# EAGLE board EEG_v3_11 (EAGLE 9.6.2), part 1 of 2
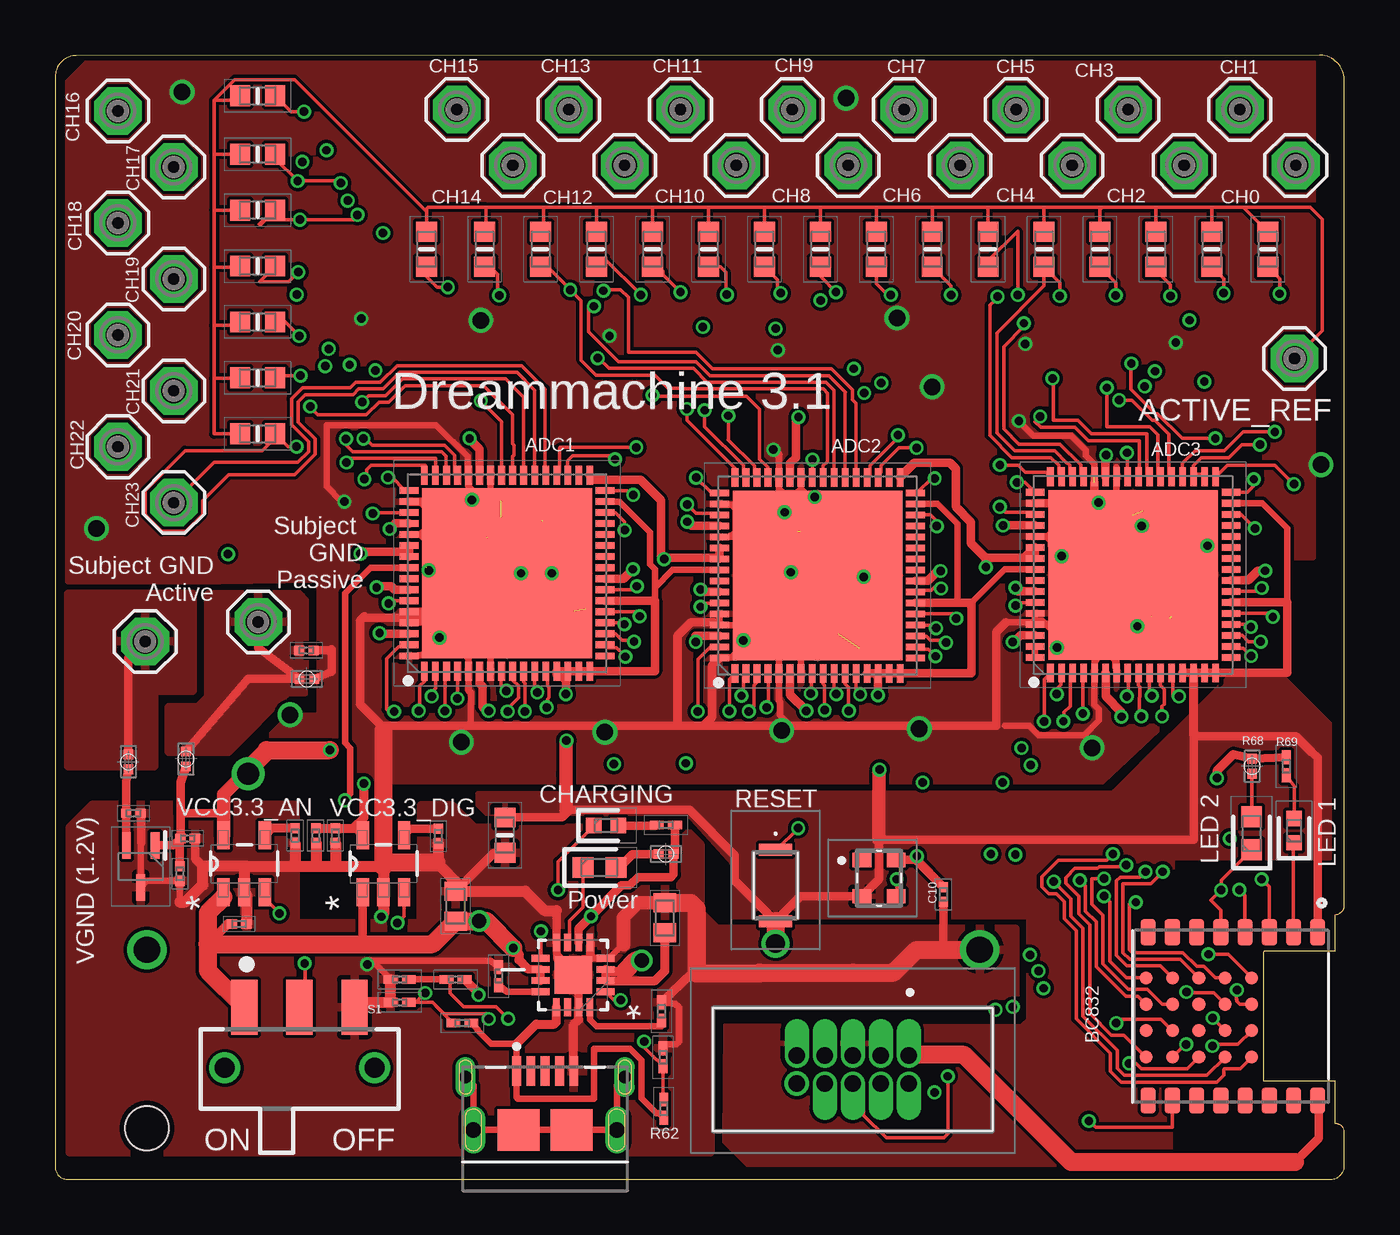
[diagram p0: board, top side]
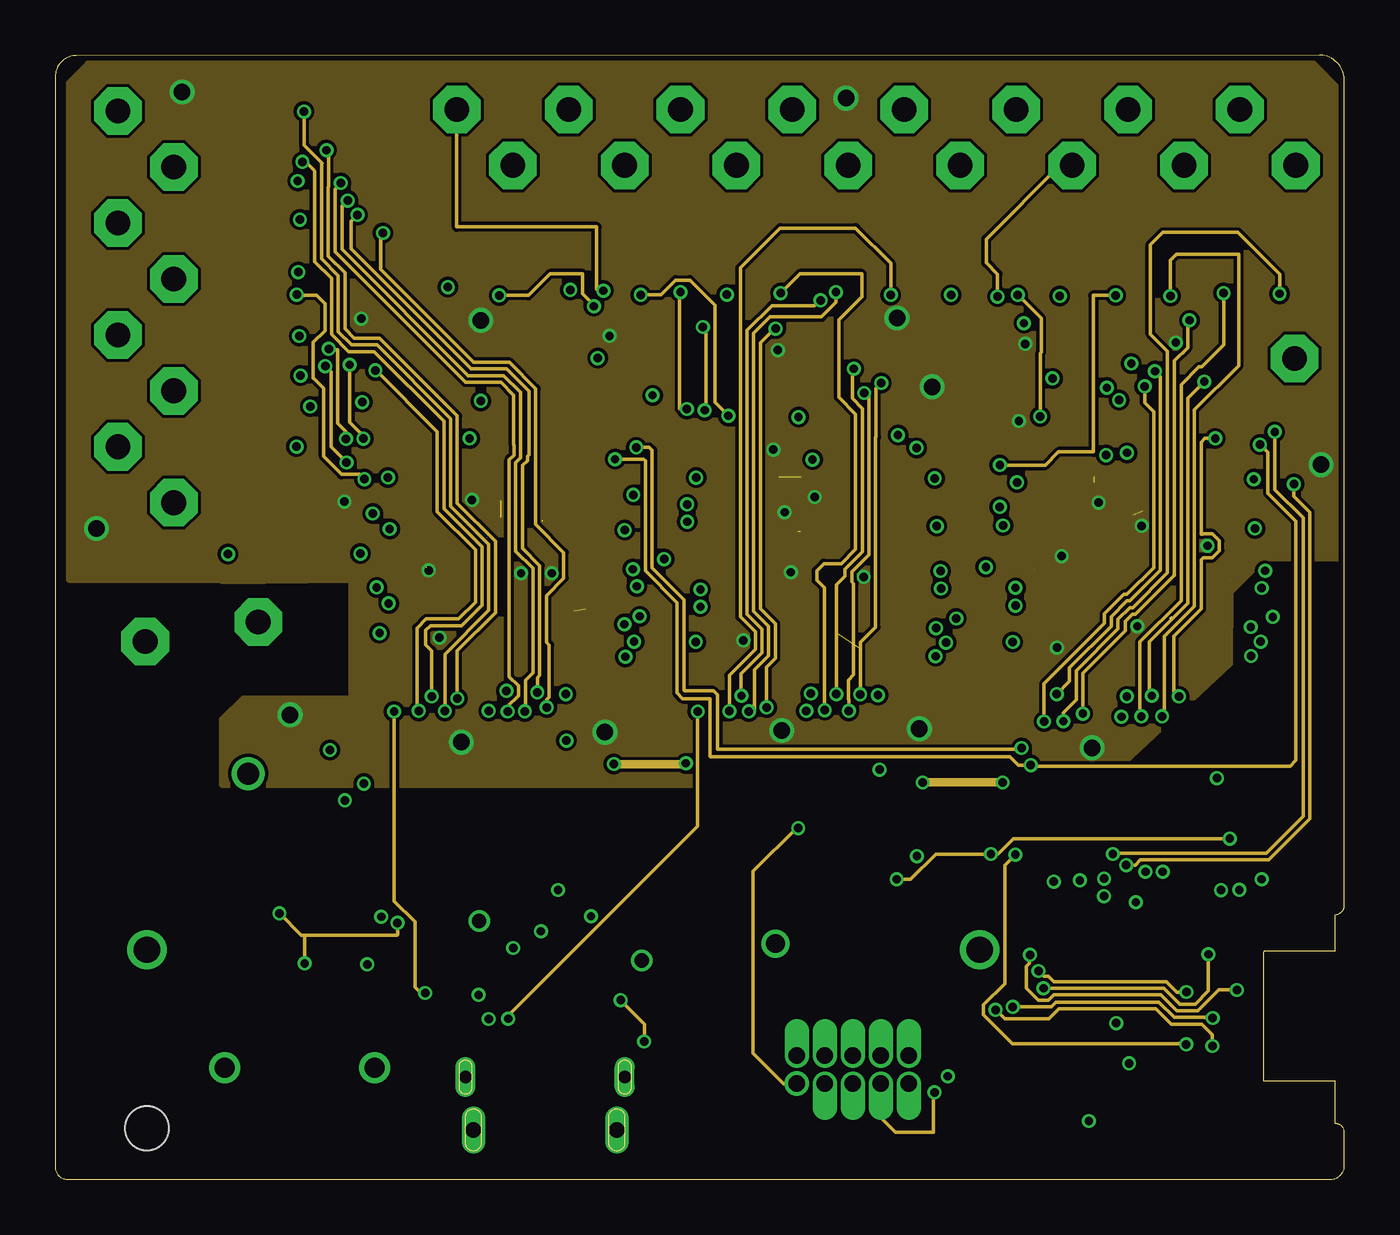
[diagram p1: board, inner layer Route2]
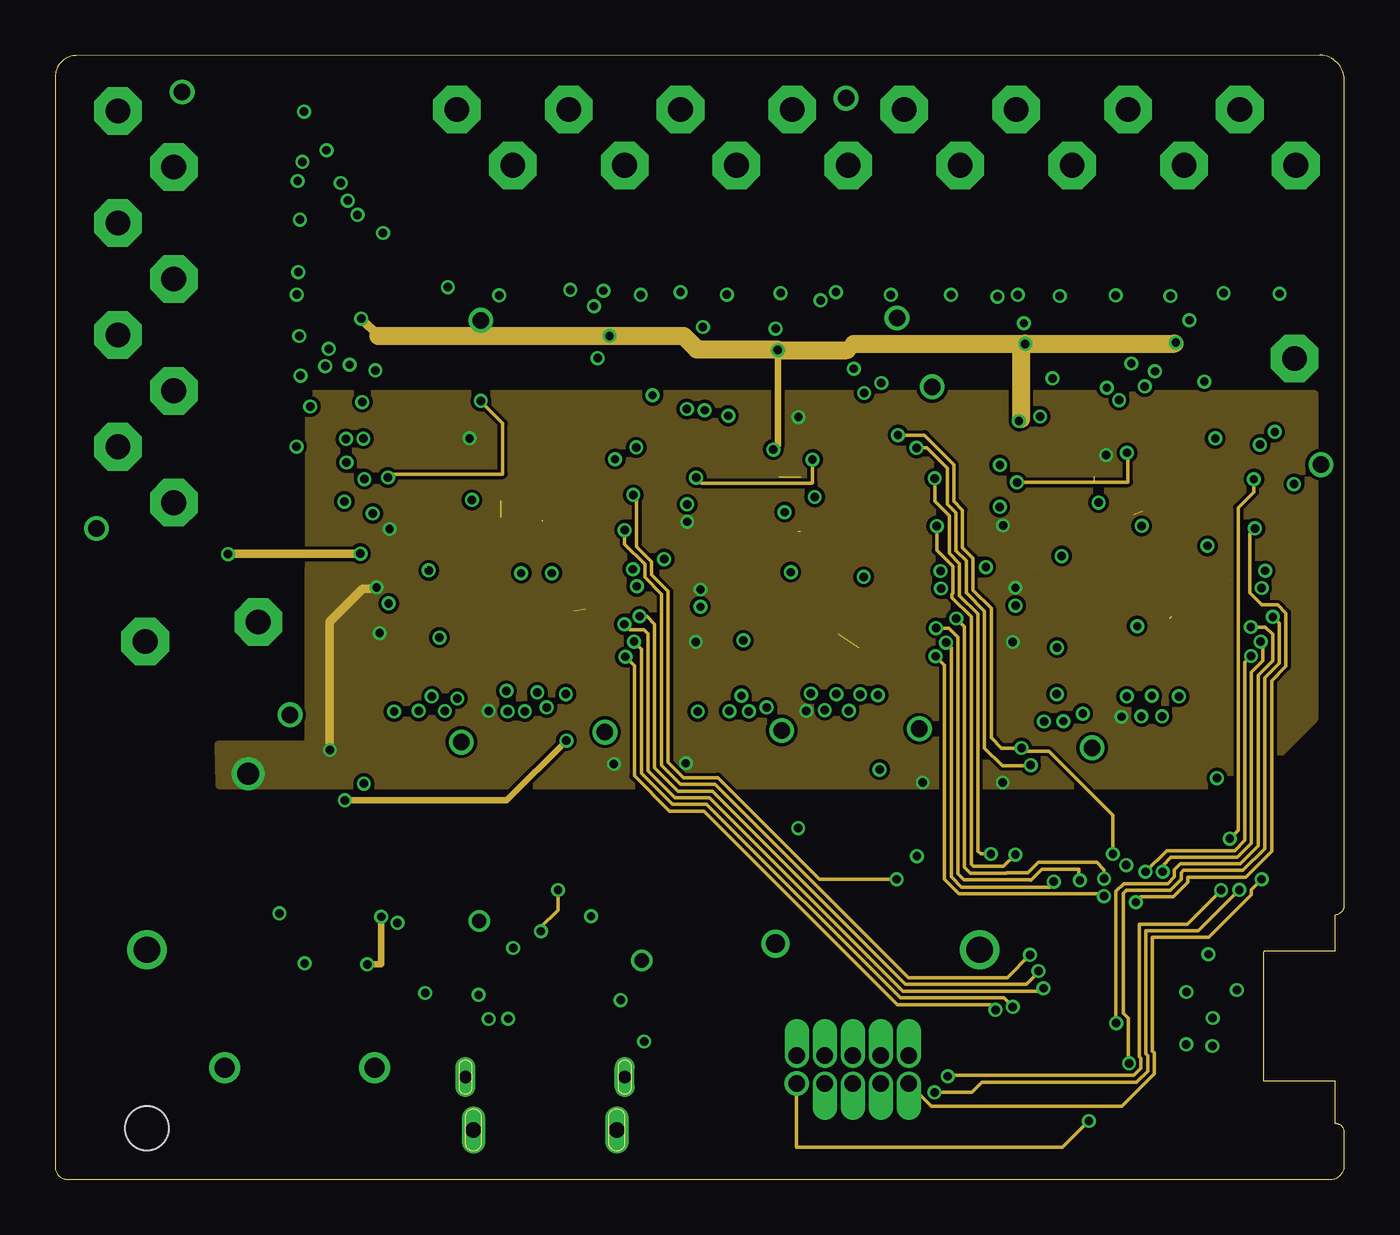
[diagram p2: board, inner layer Route15]
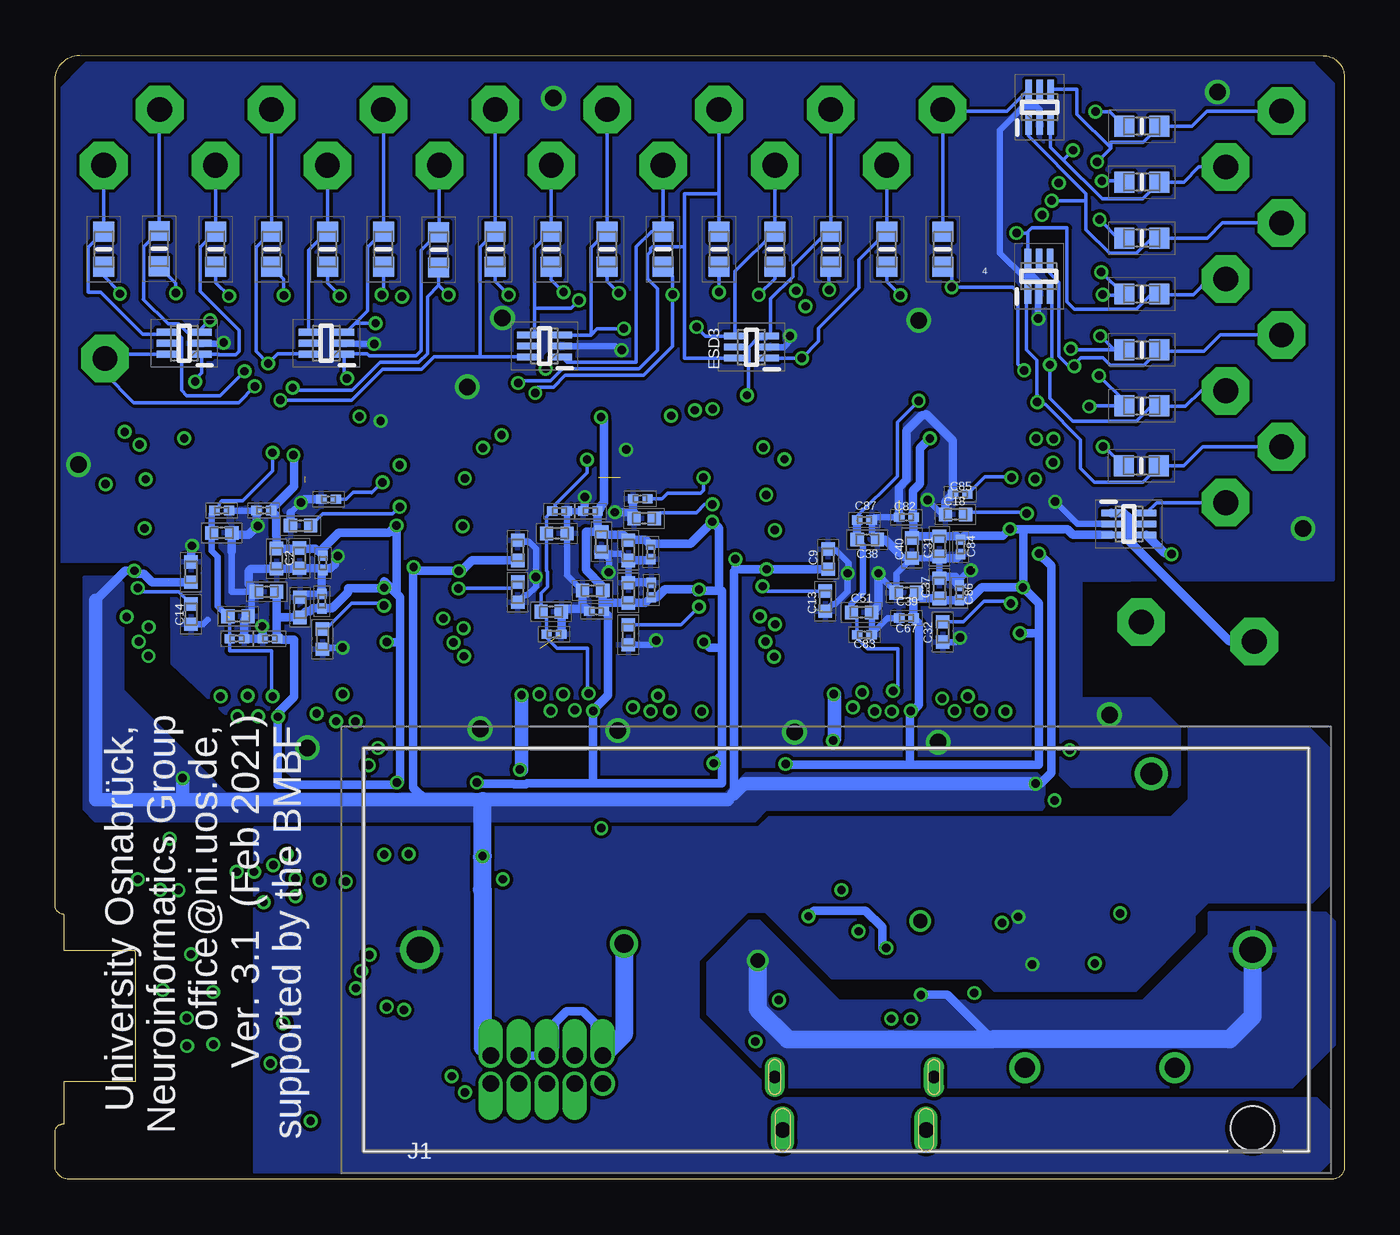
[diagram p3: board, bottom side, seen from below]

Size 58.55 x 51.03 mm. Coordinates in mm from the lower left corner, seen from the top.
Outline: 0,0.64 arc90 0.49,0 57.89,0 arc90 58.55,0.58 58.55,2.2 arc80 58.14,2.52 58.14,4.45 54.89,4.45 54.89,10.26 54.92,10.36 58.14,10.36 58.14,12.01 arc90 58.55,12.45 58.55,49.81 arc90 57.46,51.03 57.43,51.03 0.97,51 arc90 0,50.04 0,0.64
Copper layers (1+2*15+16): Top 0.018mm / dielectric 0.36mm / Route2 0.035mm / dielectric 0.71mm / Route15 0.035mm / dielectric 0.2mm / Bottom 0.018mm
Design rules "eC_4Layer_PClass6_BaseCopperO18-I35_eCDefault *": minimum track width 0.15mm, minimum drill 0.35mm, track to track 0.15mm, track to pad 0.15mm, pad to pad 0.15mm, via to via 0.15mm, smd to smd 0mil, copper to edge 0.25mm, drill to drill 0.35mm, minimum pad ring 0.175mm, minimum via ring 0.125mm, stop-mask expansion 0mil, vias tented up to drill 0.45mm, thermal gap 0.2mm
Net classes: 0 default: width 0.152 mm, drill 0.381 mm; 1 power: width 0.305 mm, drill 0.381 mm; 2 power2: width 0.381 mm, drill 0.381 mm

## Footprints (pad centres in the part's own frame; a part is rotated, then mirrored left to right if it is on the bottom)
SE11 = drill 1.118 pad 2.159 octagon: MP 0,0
QFN50P900X900X80-65N = smd 0.85 x 0.3: 1 -4.45,3.75; 2 -4.45,3.25; 3 -4.45,2.75; 4 -4.45,2.25; 5 -4.45,1.75; 6 -4.45,1.25; 7 -4.45,0.75; 8 -4.45,0.25; 9 -4.45,-0.25; 10 -4.45,-0.75; 11 -4.45,-1.25; 12 -4.45,-1.75; 13 -4.45,-2.25; 14 -4.45,-2.75; 15 -4.45,-3.25; 16 -4.45,-3.75; 33 4.45,-3.75; 34 4.45,-3.25; 35 4.45,-2.75; 36 4.45,-2.25; 37 4.45,-1.75; 38 4.45,-1.25; 39 4.45,-0.75; 40 4.45,-0.25; 41 4.45,0.25; 42 4.45,0.75; 43 4.45,1.25; 44 4.45,1.75; 45 4.45,2.25; 46 4.45,2.75; 47 4.45,3.25; 48 4.45,3.75 | smd 0.3 x 0.85: 17 -3.75,-4.45; 18 -3.25,-4.45; 19 -2.75,-4.45; 20 -2.25,-4.45; 21 -1.75,-4.45; 22 -1.25,-4.45; 23 -0.75,-4.45; 24 -0.25,-4.45; 25 0.25,-4.45; 26 0.75,-4.45; 27 1.25,-4.45; 28 1.75,-4.45; 29 2.25,-4.45; 30 2.75,-4.45; 31 3.25,-4.45; 32 3.75,-4.45; 49 3.75,4.45; 50 3.25,4.45; 51 2.75,4.45; 52 2.25,4.45; 53 1.75,4.45; 54 1.25,4.45; 55 0.75,4.45; 56 0.25,4.45; 57 -0.25,4.45; 58 -0.75,4.45; 59 -1.25,4.45; 60 -1.75,4.45; 61 -2.25,4.45; 62 -2.75,4.45; 63 -3.25,4.45; 64 -3.75,4.45 | smd 7.7 x 7.7: 65 0,0
XCVR_BC832 = smd 1.19 x 0.69: 1 -3.82,3.918; 2 -3.82,2.818; 3 -3.82,1.718; 4 -3.82,0.618; 5 -3.82,-0.482; 6 -3.82,-1.582; 7 -3.82,-2.682; 8 -3.82,-3.782; 9 3.82,-3.782; 10 3.82,-2.682; 11 3.82,-1.582; 12 3.82,-0.482; 13 3.82,0.618; 14 3.82,1.718; 15 3.82,2.818; 16 3.82,3.918 | smd 0.6 x 0.6: A1 -1.75,0.919; A2 -1.75,-0.281; A3 -1.75,-1.481; A4 -1.75,-2.681; A5 -1.75,-3.881; B1 -0.55,0.919; B2 -0.55,-0.281; B3 -0.55,-1.481; B4 -0.55,-2.681; B5 -0.55,-3.881; C1 0.65,0.919; C2 0.65,-0.281; C3 0.65,-1.481; C4 0.65,-2.681; C5 0.65,-3.881; D1 1.85,0.919; D2 1.85,-0.281; D3 1.85,-1.481; D4 1.85,-2.681; D5 1.85,-3.881
CAPC1005X33N = smd 0.6 x 0.62: 1 -0.46,0; 2 0.46,0
CAPC0603X33N = smd 0.46 x 0.42: 1 -0.33,0; 2 0.33,0
CAPC1608X100N = smd 0.87 x 1.02: 1 -0.68,0; 2 0.68,0
QFN50P300X300X100-17N = smd 0.813 x 0.305: 1 -1.473,0.762; 2 -1.473,0.254; 3 -1.473,-0.254; 4 -1.473,-0.762; 9 1.473,-0.762; 10 1.473,-0.254; 11 1.473,0.254; 12 1.473,0.762 | smd 0.305 x 0.813: 5 -0.762,-1.473; 6 -0.254,-1.473; 7 0.254,-1.473; 8 0.762,-1.473; 13 0.762,1.473; 14 0.254,1.473; 15 -0.254,1.473; 16 -0.762,1.473 | smd 1.702 x 1.702: 17 0,0
DSC1001DI50081920T = smd 0.85 x 0.65: 1 -0.775,0.825; 2 -0.775,-0.825; 3 0.775,-0.825; 4 0.775,0.825
SOT65P210X110-3N = smd 1.2 x 0.4: 1 -0.95,0.65; 2 -0.95,-0.65; 3 0.95,0
SOP50P160X60-6N = smd 0.914 x 0.3: 1 -0.798,0.5 | smd 0.904 x 0.3: 2 -0.798,0; 3 -0.798,-0.5; 4 0.798,-0.5; 5 0.798,0; 6 0.798,0.5
SHF10501LDTHTR = drill 0.74 pad 1.1 offset: 1 0,0; 2 0,1.27; 3 1.27,0; 4 1.27,1.27; 5 2.54,0; 6 2.54,1.27; 7 3.81,0; 8 3.81,1.27; 9 5.08,0 | drill 0.74 pad 1.1: 10 5.08,1.27
TE_2040002-1 = smd 0.4 x 1.35: 1 -1.3,2.675; 2 -0.65,2.675; 3 0,2.675; 4 0.65,2.675; 5 1.3,2.675 | smd 1.9 x 1.9: S4 -1.2,0; S5 1.2,0 | drill 0.56 long: SH1 -3.615,2.4; SH2 3.615,2.4 | drill 0.71 long: SH3 3.255,0; SH4 -3.255,0
LEDC1006X25N = smd 0.7 x 0.7: 1 -0.55,0; 2 0.55,0
LEDC1608X80N = smd 0.95 x 0.95: 1 -0.75,0; 2 0.75,0
RESC1608X55N = smd 0.9 x 0.95: 1 -0.8,0; 2 0.8,0
RESC0603X26N = smd 0.44 x 0.42: 1 -0.34,0; 2 0.34,0
RESC0603X26N' = smd 0.625 x 0.4: 1 -0.412,0; 2 0.412,0
RESC0603X28N = smd 0.625 x 0.4: 1 -0.412,0; 2 0.412,0
TL3780AF330QG = smd 0.55 x 1.5: 1 -1.625,0; 2 1.625,0
JS102011SAQN = smd 1.2 x 2.5: 1 -2.5,1; 2 0,1; 3 2.5,1 | drill 0.9 pad 1.4: 4 -3.4,-1.75; 5 3.4,-1.75
1051 = drill 1.19 pad 1.785: 1 0,0; 2 37.82,0 | hole 1.98: 0,8.1
SOT95P280X145-5N = smd 1.27 x 0.559: 1 -1.295,0.94; 2 -1.295,0; 3 -1.295,-0.94; 4 1.295,-0.94; 5 1.295,0.94

## Placement (x,y rotation side)
ACTIVE_REF  SE11  [SE11]  56.29,37.26 0 top
ADC1  AD7779ACPZ  [QFN50P900X900X80-65N]  20.53,27.51 90 top
ADC2  AD7779ACPZ  [QFN50P900X900X80-65N]  34.62,27.41 90 top
ADC3  AD7779ACPZ  [QFN50P900X900X80-65N]  48.95,27.43 90 top
BC832  BC832  [XCVR_BC832]  53.42,7.39 270 top
C1  1 uF  [CAPC1005X33N]  46.41,24.51 270 bottom
C2  1 uF  [CAPC1005X33N]  47.45,28.19 90 bottom
C3  2.2uF  [CAPC0603X33N]  12.73,15.6 90 top
C4  1 uF  [CAPC1005X33N]  52.38,27.56 90 bottom
C5  0.01uF  [CAPC0603X33N]  17.4,15.57 90 top
C6  1 uF  [CAPC1005X33N]  37.55,28.55 90 bottom
C7  1 uF  [CAPC1005X33N]  47.4,29.67 180 bottom
C8  1 uF  [CAPC1005X33N]  50.98,29.34 0 bottom
C9  1 uF  [CAPC1005X33N]  23.45,28.14 90 bottom
C10  0.01uF  [CAPC0603X33N]  40.34,12.93 90 top
C11  1 uF  [CAPC1005X33N]  47.43,25.96 90 bottom
C12  1 uF  [CAPC1005X33N]  37.55,26.65 90 bottom
C13  1 uF  [CAPC1005X33N]  23.58,26.24 90 bottom
C14  1 uF  [CAPC1005X33N]  52.38,25.65 270 bottom
C15  1 uF  [CAPC1005X33N]  31.81,30 180 bottom
C16  1 uF  [CAPC1005X33N]  48.95,26.67 0 bottom
C17  1 uF  [CAPC1005X33N]  48.49,28.17 90 bottom
C18  1 uF  [CAPC1005X33N]  17.66,30.18 180 bottom
C19  2.2uF  [CAPC0603X33N]  8.36,11.58 180 top
C20  0.1 uF  [CAPC0603X33N]  11.84,15.6 90 top
C21  1 uF  [CAPC1005X33N]  50.25,25.55 180 bottom
C22  2.2uF  [CAPC0603X33N]  3.56,16.61 180 top
C23  2.2uF  [CAPC0603X33N]  5.67,13.87 90 top
C24  1 uF  [CAPC1005X33N]  34.14,26.72 0 bottom
C25  1 uF  [CAPC1005X33N]  32.52,28.55 90 bottom
C26  1 uF  [CAPC1005X33N]  32.52,24.72 270 bottom
C27  1 uF  [CAPC1005X33N]  35.77,29.31 0 bottom
C28  1 uF  [CAPC1005X33N]  32.52,26.62 90 bottom
C29  1 uF  [CAPC1005X33N]  36.02,25.76 180 bottom
C30  1 uF  [CAPC1005X33N]  33.74,28.93 90 bottom
C31  1 uF  [CAPC1005X33N]  18.39,28.73 90 bottom
C32  1 uF  [CAPC1005X33N]  18.24,24.84 270 bottom
C33  2.2uF  [CAPC0603X33N]  11.41,24 180 top
C37  1 uF  [CAPC1005X33N]  18.39,26.82 90 bottom
C38  1 uF  [CAPC1005X33N]  21.67,29.03 0 bottom
C39  1 uF  [CAPC1005X33N]  19.89,26.62 0 bottom
C40  1 uF  [CAPC1005X33N]  19.64,28.65 90 bottom
C51  1 uF  [CAPC1005X33N]  21.92,25.73 180 bottom
C55  10 uF  [CAPC1608X100N]  27.69,11.86 270 top
C56  10 uF  [CAPC1608X100N]  18.19,12.4 270 top
C57  0.01uF  [CAPC0603X33N]  10.9,15.6 270 top
C64  0.1 uF  [CAPC0603X33N]  35.89,24.74 180 bottom
C65  0.1 uF  [CAPC0603X33N]  46.13,30.86 0 bottom
C66  0.1 uF  [CAPC0603X33N]  46.44,26.24 90 bottom
C67  0.1 uF  [CAPC0603X33N]  19.89,25.48 0 bottom
C68  0.1 uF  [CAPC0603X33N]  46.39,27.97 90 bottom
C69  0.1 uF  [CAPC0603X33N]  49.08,30.35 0 bottom
C70  0.1 uF  [CAPC0603X33N]  50.3,24.54 180 bottom
C71  0.1 uF  [CAPC0603X33N]  35.64,30.33 0 bottom
C72  0.1 uF  [CAPC0603X33N]  33.96,25.78 0 bottom
C73  0.1 uF  [CAPC0603X33N]  34.24,30.33 0 bottom
C74  0.1 uF  [CAPC0603X33N]  31.98,30.89 0 bottom
C75  0.1 uF  [CAPC0603X33N]  6.02,15.47 180 top
C77  0.1 uF  [CAPC0603X33N]  31.5,28.47 90 bottom
C78  0.1 uF  [CAPC0603X33N]  31.48,26.75 90 bottom
C79  0.1 uF  [CAPC0603X33N]  48.8,24.54 0 bottom
C81  0.1 uF  [CAPC0603X33N]  50.98,30.35 0 bottom
C82  0.1 uF  [CAPC0603X33N]  19.89,30.05 0 bottom
C83  0.1 uF  [CAPC0603X33N]  21.8,24.72 180 bottom
C84  0.1 uF  [CAPC0603X33N]  17.43,28.7 90 bottom
C85  0.1 uF  [CAPC0603X33N]  17.45,31.09 0 bottom
C86  0.1 uF  [CAPC0603X33N]  17.48,26.62 90 bottom
C87  0.1 uF  [CAPC0603X33N]  21.8,29.92 0 bottom
CH0  SE11  [SE11]  56.34,46.03 0 top
CH1  SE11  [SE11]  53.8,48.57 0 top
CH2  SE11  [SE11]  51.26,46.03 0 top
CH3  SE11  [SE11]  48.72,48.57 0 top
CH4  SE11  [SE11]  46.18,46.03 0 top
CH5  SE11  [SE11]  43.64,48.57 0 top
CH6  SE11  [SE11]  41.1,46.03 0 top
CH7  SE11  [SE11]  38.56,48.57 0 top
CH8  SE11  [SE11]  36.02,46.03 0 top
CH9  SE11  [SE11]  33.48,48.57 0 top
CH10  SE11  [SE11]  30.94,46.03 0 top
CH11  SE11  [SE11]  28.4,48.57 0 top
CH12  SE11  [SE11]  25.86,46.03 0 top
CH13  SE11  [SE11]  23.32,48.57 0 top
CH14  SE11  [SE11]  20.78,46.03 0 top
CH15  SE11  [SE11]  18.24,48.57 0 top
CH16  SE11  [SE11]  2.85,48.49 0 top
CH17  SE11  [SE11]  5.39,45.95 0 top
CH18  SE11  [SE11]  2.85,43.41 0 top
CH19  SE11  [SE11]  5.39,40.87 0 top
CH20  SE11  [SE11]  2.85,38.33 0 top
CH21  SE11  [SE11]  5.39,35.79 0 top
CH22  SE11  [SE11]  2.85,33.25 0 top
CH23  SE11  [SE11]  5.39,30.71 0 top
CHARGING  BQ24072TRGTR  [QFN50P300X300X100-17N]  23.53,9.27 180 top
CLOCK  DSC1001DI5-008.1920T  [DSC1001DI50081920T]  37.42,13.67 0 top
D1  REF3312AIDCKR  [SOT65P210X110-3N]  3.89,14.2 270 top
ESD1  TPD4E1B06DRLR  [SOP50P160X60-6N]  13.87,41 90 bottom
ESD2  TPD4E1B06DRLR  [SOP50P160X60-6N]  13.85,48.67 90 bottom
ESD3  TPD4E1B06DRLR  [SOP50P160X60-6N]  26.93,37.77 180 bottom
ESD4  TPD4E1B06DRLR  [SOP50P160X60-6N]  36.33,37.82 180 bottom
ESD5  TPD4E1B06DRLR  [SOP50P160X60-6N]  46.23,37.95 180 bottom
ESD6  TPD4E1B06DRLR  [SOP50P160X60-6N]  52.68,37.95 180 bottom
ESD7  TPD4E1B06DRLR  [SOP50P160X60-6N]  9.78,29.74 0 bottom
J1  SHF-105-01-L-D-TH-TR  [SHF10501LDTHTR]  38.77,5.61 180 top
J3  2040002-1  [TE_2040002-1]  22.26,2.24 0 top
LED1  SML-P11MTT86R  [LEDC1006X25N]  56.27,15.83 90 top
LED2  SML-P11MTT86R  [LEDC1006X25N]  25.02,16.05 0 top
LED3  150060RS75000  [LEDC1608X80N]  54.34,15.7 90 top
LED4  150060RS75000  [LEDC1608X80N]  24.72,14.15 0 top
R1  0 Ohm  [RESC1608X55N]  23.32,42.22 270 bottom
R2  0 Ohm  [RESC1608X55N]  9.22,32.39 180 bottom
R3  0 Ohm  [RESC1608X55N]  9.2,35.1 180 bottom
R4  0 Ohm  [RESC1608X55N]  9.2,37.64 180 bottom
R5  0 Ohm  [RESC1608X55N]  9.2,40.18 180 bottom
R6  0 Ohm  [RESC1608X55N]  9.2,42.72 180 bottom
R7  0 Ohm  [RESC1608X55N]  9.2,45.26 180 bottom
R8  0 Ohm  [RESC1608X55N]  9.2,47.8 180 bottom
R9  0 Ohm  [RESC1608X55N]  18.24,42.22 270 bottom
R10  0 Ohm  [RESC1608X55N]  20.78,42.22 270 bottom
R11  0 Ohm  [RESC1608X55N]  25.86,42.22 270 bottom
R12  0 Ohm  [RESC1608X55N]  28.4,42.22 270 bottom
R13  0 Ohm  [RESC1608X55N]  30.94,42.22 270 bottom
R14  0 Ohm  [RESC1608X55N]  33.48,42.22 270 bottom
R15  0 Ohm  [RESC1608X55N]  36.02,42.22 270 bottom
R16  0 Ohm  [RESC1608X55N]  38.56,42.22 270 bottom
R17  0 Ohm  [RESC1608X55N]  41.13,42.19 270 bottom
R18  0 Ohm  [RESC1608X55N]  43.64,42.22 270 bottom
R19  0 Ohm  [RESC1608X55N]  46.18,42.22 270 bottom
R20  0 Ohm  [RESC1608X55N]  48.72,42.22 270 bottom
R21  0 Ohm  [RESC1608X55N]  51.26,42.22 270 bottom
R22  0 Ohm  [RESC1608X55N]  53.83,42.24 270 bottom
R23  0 Ohm  [RESC1608X55N]  56.34,42.22 270 bottom
R24  0 Ohm  [RESC1608X55N]  55.07,42.22 270 top
R25  0 Ohm  [RESC1608X55N]  52.53,42.22 270 top
R26  0 Ohm  [RESC1608X55N]  49.99,42.22 270 top
R27  0 Ohm  [RESC1608X55N]  47.45,42.22 270 top
R28  0 Ohm  [RESC1608X55N]  44.91,42.22 270 top
R29  0 Ohm  [RESC1608X55N]  42.37,42.22 270 top
R30  0 Ohm  [RESC1608X55N]  39.83,42.22 270 top
R31  0 Ohm  [RESC1608X55N]  37.29,42.22 270 top
R32  0 Ohm  [RESC1608X55N]  34.75,42.22 270 top
R33  0 Ohm  [RESC1608X55N]  32.21,42.22 270 top
R34  0 Ohm  [RESC1608X55N]  29.67,42.22 270 top
R35  0 Ohm  [RESC1608X55N]  27.13,42.22 270 top
R36  0 Ohm  [RESC1608X55N]  24.59,42.22 270 top
R37  0 Ohm  [RESC1608X55N]  22.05,42.22 270 top
R38  0 Ohm  [RESC1608X55N]  19.51,42.22 270 top
R39  0 Ohm  [RESC1608X55N]  20.43,15.62 270 top
R40  0 Ohm  [RESC1608X55N]  16.87,42.22 270 top
R41  2.7 kohm  [RESC0603X26N]  27.74,14.76 0 top
R42  0 Ohm  [RESC1608X55N]  9.2,49.18 0 top
R43  2 kohm  [RESC0603X26N']  27.74,16.08 0 top
R44  0 Ohm  [RESC1608X55N]  9.2,46.53 0 top
R45  300 Ohm  [RESC0603X26N]  3.33,18.95 270 top
R46  0 Ohm  [RESC1608X55N]  9.2,43.99 0 top
R47  300 Ohm  [RESC0603X26N]  5.95,19.08 90 top
R48  0 Ohm  [RESC1608X55N]  9.2,41.45 0 top
R49  41.2 kOhms  [RESC0603X28N]  15.65,8.03 180 top
R50  0 Ohm  [RESC1608X55N]  9.2,38.91 0 top
R51  2.2 kohm  [RESC0603X28N]  20.15,9.22 270 top
R52  0 Ohm  [RESC1608X55N]  9.2,36.37 0 top
R53  3 kohm  [RESC0603X26N']  27.54,7.62 270 top
R54  0 Ohm  [RESC1608X55N]  9.2,33.83 0 top
R55  41.2kOhms  [RESC0603X28N]  18.19,9.07 0 top
R56  41.2kOhms  [RESC0603X28N]  15.65,9.07 0 top
R57  41.2kOhms  [RESC0603X28N]  18.5,7.09 0 top
R58  300 Ohm  [RESC0603X26N]  11.43,22.71 0 top
R62  200kohm  [RESC0603X28N]  27.64,3.2 270 top
R65  49.9 kOhms  [RESC0603X28N]  27.61,5.54 270 top
R68  2.7kohm  [RESC0603X26N]  54.36,18.75 90 top
R69  2 kohm  [RESC0603X26N']  55.91,18.75 90 top
RESET  TL3780AF330QG  [TL3780AF330QG]  32.72,13.34 270 top
S1  JS102011SAQN  [JS102011SAQN]  11.1,6.81 0 top
SUBJECT_GND  SE11  [SE11]  4.09,24.41 0 top
SUBJECT_GND_VD  SE11  [SE11]  9.22,25.3 0 top
U2  1051  [1051]  4.17,10.41 180 bottom
VCC3.3_AN  TPS73233DBVT  [SOT95P280X145-5N]  8.59,14.33 90 top
VCC3.3_DIG  TPS73233DBVT  [SOT95P280X145-5N]  14.91,14.33 90 top

## Library data of the parts
ACTIVE_REF CH0 CH1-CH23 SUBJECT_GND SUBJECT_GND_VD = solpad
ADC1-ADC3 = AD7779ACPZ; ARROW_PART_NUMBER: AD7779ACPZ; ARROW_PRICE-STOCK: https://www.arrow.com/en/products/ad7779acpz/analog-devices; DESCRIPTION: Analog Devices AD7779ACPZ, 24 bit Serial ADC, 8-channel Differential Input, 64-Pin LFCSP; HEIGHT: 0.8mm; MANUFACTURER_NAME: Analog Devices; MANUFACTURER_PART_NUMBER: AD7779ACPZ; MOUSER_PART_NUMBER: 584-AD7779ACPZ; MOUSER_PRICE-STOCK: https://www.mouser.co.uk/ProductDetail/Analog-Devices/AD7779ACPZ/?qs=FZGwosfx5a6iB1lfzEP3Rw%3D%3D
BC832 = BC832; AVAILABILITY: Unavailable; DESCRIPTION: Bluetooth Bluetooth v5.0 Transceiver Module 2.4GHz Integrated, Chip Surface Mount; MF: Fanstel Corp.; MP: BC832; PACKAGE: Module Fanstel Corp.; PRICE: None
C1 C2 C4 C6-C9 C11-C18 C21 C24-C32 C37-C40 C51 = JMK105BJ105MP-F; DESCRIPTION: Taiyo Yuden JMK105BJ105MP-F 1F MLCC 6.3V dc +/-20% Tolerance SMD; HEIGHT: 0.33mm; MANUFACTURER_NAME: TAIYO YUDEN; MANUFACTURER_PART_NUMBER: JMK105BJ105MP-F; MOUSER_PART_NUMBER: 963-JMK105BJ105MP-F; MOUSER_PRICE-STOCK: https://www.mouser.com/Search/Refine.aspx?Keyword=963-JMK105BJ105MP-F; RS_PART_NUMBER: 1843471; RS_PRICE-STOCK: https://uk.rs-online.com/web/p/products/1843471
C3 C19 C22 C23 C33 = SamacSys_Parts; DESCRIPTION: Multilayer Ceramic Capacitors MLCC - SMD/SMT 0201 2.2uF 6.3volts; HEIGHT: 0.33mm; MANUFACTURER_NAME: Murata Electronics; MANUFACTURER_PART_NUMBER: GRM033R60J225ME47D; MOUSER_PART_NUMBER: 81-GRM033R60J225ME7D; MOUSER_PRICE-STOCK: https://www.mouser.com/Search/Refine.aspx?Keyword=81-GRM033R60J225ME7D
C5 C10 C57 = GRM033R61E103MA12J; DESCRIPTION: Multilayer Ceramic Capacitors MLCC - SMD/SMT 0201 0.01uF 25volts *Derate Voltage/Temp; HEIGHT: 0.33mm; MANUFACTURER_NAME: Murata Electronics; MANUFACTURER_PART_NUMBER: GRM033R61E103MA12J; MOUSER_PART_NUMBER: 81-GRM033R61E103MA2J; MOUSER_PRICE-STOCK: https://www.mouser.co.uk/ProductDetail/Murata-Electronics/GRM033R61E103MA12J?qs=hNud%2FORuBR1kPmeKqdhtJA%3D%3D
C20 C64-C75 C77-C79 C81-C87 = LMK063C6104KP-F; DESCRIPTION: 0201 (0603M), 0402 (1005M) 100nF MLCC 10V dc +/-10% SMD LMK063C6104KP-F; HEIGHT: 0.33mm; MANUFACTURER_NAME: TAIYO YUDEN; MANUFACTURER_PART_NUMBER: LMK063C6104KP-F; MOUSER_PART_NUMBER: 963-LMK063C6104KP-F; MOUSER_PRICE-STOCK: https://www.mouser.co.uk/ProductDetail/Taiyo-Yuden/LMK063C6104KP-F?qs=vF%252B8ahGVildHIKWi2d6PKQ%3D%3D; RS_PART_NUMBER: 1843409P; RS_PRICE-STOCK: http://uk.rs-online.com/web/p/products/1843409P
C55 C56 = EMK107BBJ106MA-T; DESCRIPTION: TAIYO YUDEN - EMK107BBJ106MA-T - CAPACITOR, MLCC, X5R, 10UF, 16V, 0603, REEL; HEIGHT: 1mm; MANUFACTURER_NAME: TAIYO YUDEN; MANUFACTURER_PART_NUMBER: EMK107BBJ106MA-T; MOUSER_PART_NUMBER: 963-EMK107BBJ106MA-T; MOUSER_PRICE-STOCK: https://www.mouser.com/Search/Refine.aspx?Keyword=963-EMK107BBJ106MA-T; RS_PART_NUMBER: 1843904P; RS_PRICE-STOCK: http://uk.rs-online.com/web/p/products/1843904P
CHARGING = ti; MPN: BQ24072TRGTR; OC_FARNELL: -; OC_NEWARK: 74R6078; PACKAGE: QFN-16; SUPPLIER: Texas Instruments
CLOCK = DSC1001DI5-008.1920T; DESCRIPTION: Standard Clock Oscillators MEMS Oscillator, Low Power, -40C-85C, 10ppm 1.8V-3.3V Low-Power Precision CMOS Oscillators; HEIGHT: 0.85mm; MANUFACTURER_NAME: Microchip; MANUFACTURER_PART_NUMBER: DSC1001DI5-008.1920T; MOUSER_PART_NUMBER: 998-1001DI5008.1920T; MOUSER_PRICE-STOCK: https://www.mouser.co.uk/ProductDetail/Microchip-Technology-Micrel/DSC1001DI5-0081920T?qs=moDRE%2FDosU0uLfPLWfhb9w%3D%3D
D1 = SamacSys_Parts; ARROW_PART_NUMBER: REF3312AIDCKR; ARROW_PRICE-STOCK: https://www.arrow.com/en/products/ref3312aidckr/texas-instruments; DESCRIPTION: 30ppm/C Drift, 3.9A, SOT23-3, SC70-3, UQFN-8 Voltage Reference; HEIGHT: 1.1mm; MANUFACTURER_NAME: Texas Instruments; MANUFACTURER_PART_NUMBER: REF3312AIDCKR; MOUSER_PART_NUMBER: 595-REF3312AIDCKR; MOUSER_PRICE-STOCK: https://www.mouser.co.uk/ProductDetail/Texas-Instruments/REF3312AIDCKR/?qs=7KoJEllG3D1w060VYgtxSw%3D%3D
ESD1-ESD7 = TPD4E1B06DRLR; DESCRIPTION: Bidirectional Quad-Channel High-Speed ESD Protection Device; HEIGHT: 0.6mm; MANUFACTURER_NAME: Texas Instruments; MANUFACTURER_PART_NUMBER: TPD4E1B06DRLR; MOUSER_PART_NUMBER: 595-TPD4E1B06DRLR; MOUSER_PRICE-STOCK: https://www.mouser.com/Search/Refine.aspx?Keyword=595-TPD4E1B06DRLR
J1 = SHF-105-01-L-D-TH-TR; DESCRIPTION: Headers & Wire Housings .050" Shrouded Terminal Strip For FFSD; HEIGHT: 5.33mm; MANUFACTURER_NAME: SAMTEC; MANUFACTURER_PART_NUMBER: SHF-105-01-L-D-TH-TR; MOUSER_PART_NUMBER: 200-SHF10501LDTHTR; MOUSER_PRICE-STOCK: https://www.mouser.co.uk/ProductDetail/Samtec/SHF-105-01-L-D-TH-TR?qs=%252BZP6%2F%252BtExtDFuyepp9uTfQ%3D%3D
J3 = 2040002-1; AVAILABILITY: Unavailable; CENTERLINE_PITCH: .65 mm[.025 in]; COMMENT: 2040002-1; DESCRIPTION: Conn Micro USB 2.0 Type B RCP 5 POS 0.65mm Solder RA SMD 5 Terminal 1 Port T/R; MF: TE Connectivity; MP: 2040002-1; NUMBER_OF_POSITIONS: 5; PACKAGE: None; PRICE: None; PRODUCT_TYPE: Connector; TE_PURCHASE_URL: https://www.te.com/usa-en/product-2040002-1.html?te_bu=Cor&te_type=disp&te_campaign=seda_glo_cor-seda-global-disp-prtnr-fy19-seda-model-bom-cta_sma-317_1&elqCampaignId=32493
LED1 LED2 = SamacSys_Parts; DESCRIPTION: ROHM - SML-P11MTT86R - LED, YELLOW GREEN, 2.1MCD, 569NM, 0402; HEIGHT: 0.25mm; MANUFACTURER_NAME: ROHM Semiconductor; MANUFACTURER_PART_NUMBER: SML-P11MTT86R; MOUSER_PART_NUMBER: 755-SML-P11MTT86R; MOUSER_PRICE-STOCK: https://www.mouser.com/Search/Refine.aspx?Keyword=755-SML-P11MTT86R
LED3 LED4 = SamacSys_Parts; DESCRIPTION: WURTH ELEKTRONIK - 150060RS75000 - LED, 0603, RED, 250MCD, 625NM; HEIGHT: 0.8mm; MANUFACTURER_NAME: Wurth Elektronik; MANUFACTURER_PART_NUMBER: 150060RS75000; MOUSER_PART_NUMBER: 710-150060RS75000; MOUSER_PRICE-STOCK: https://www.mouser.com/Search/Refine.aspx?Keyword=710-150060RS75000; RS_PART_NUMBER: 8154203P; RS_PRICE-STOCK: http://uk.rs-online.com/web/p/products/8154203P
R1-R40 R42 R44 R46 R48 R50 R52 R54 = CRCW06030000Z0EAC; DESCRIPTION: Thick Film Resistors - SMD; HEIGHT: 0.55mm; MANUFACTURER_NAME: Vishay; MANUFACTURER_PART_NUMBER: CRCW06030000Z0EAC; MOUSER_PART_NUMBER: 71-CRCW06030000Z0EAC; MOUSER_PRICE-STOCK: https://www.mouser.com/Search/Refine.aspx?Keyword=71-CRCW06030000Z0EAC
R41 R68 = RC0201JR-072K7L; DESCRIPTION: YAGEO RC0201 J; HEIGHT: 0.26mm; MANUFACTURER_NAME: YAGEO (PHYCOMP); MANUFACTURER_PART_NUMBER: RC0201JR-072K7L; MOUSER_PART_NUMBER: 603-RC0201JR-072K7L; MOUSER_PRICE-STOCK: https://www.mouser.co.uk/ProductDetail/Yageo/RC0201JR-072K7L?qs=YYtPPDz42YRDge3oXinrXQ%3D%3D
R43 R69 = CR0201-JW-202GLF; DESCRIPTION: Thick Film Resistors - SMD 2K 1% 250ppm; HEIGHT: 0.26mm; MANUFACTURER_NAME: Bourns; MANUFACTURER_PART_NUMBER: CR0201-JW-202GLF; MOUSER_PART_NUMBER: 652-CR0201-JW-202GLF; MOUSER_PRICE-STOCK: http://www.mouser.com/Search/ProductDetail.aspx?qs=W7X4MxMep48Rd1KolTqn4Q%3d%3d
R45 R47 R58 = RC0201JR-07300RL; ARROW_PART_NUMBER: RC0201JR-07300RL; ARROW_PRICE-STOCK: https://www.arrow.com/en/products/rc0201jr-07300rl/yageo; DESCRIPTION: Thick Film Resistors - SMD 300 OHM 5%; HEIGHT: 0.26mm; MANUFACTURER_NAME: YAGEO (PHYCOMP); MANUFACTURER_PART_NUMBER: RC0201JR-07300RL; MOUSER_PART_NUMBER: 603-RC0201JR-07300RL; MOUSER_PRICE-STOCK: https://www.mouser.com/Search/Refine.aspx?Keyword=603-RC0201JR-07300RL
R49 R55-R57 = CRCW020141K2FNED; DESCRIPTION: Thick Film Resistors - SMD 41.2K OHM 1%; HEIGHT: 0.28mm; MANUFACTURER_NAME: Vishay; MANUFACTURER_PART_NUMBER: CRCW020141K2FNED; MOUSER_PART_NUMBER: 71-CRCW020141K2FNED; MOUSER_PRICE-STOCK: https://www.mouser.com/Search/Refine.aspx?Keyword=71-CRCW020141K2FNED
R51 = CRCW02012K20JNED; ARROW_PART_NUMBER: CRCW02012K20JNED; ARROW_PRICE-STOCK: https://www.arrow.com/en/products/crcw02012k20jned/vishay; DESCRIPTION: Thick Film Resistors - SMD 1/20watt 2.2Kohms 5% 200ppm; HEIGHT: 0.28mm; MANUFACTURER_NAME: Vishay; MANUFACTURER_PART_NUMBER: CRCW02012K20JNED; MOUSER_PART_NUMBER: 71-CRCW02012K20JNED; MOUSER_PRICE-STOCK: https://www.mouser.com/Search/Refine.aspx?Keyword=71-CRCW02012K20JNED
R53 = ERJ1GNF3001C; DESCRIPTION: PANASONIC ELECTRONIC COMPONENTS - ERJ1GNF3001C - RES, THICK FILM, 3K, 1%, 0.05W, 0201; HEIGHT: 0.26mm; MANUFACTURER_NAME: Panasonic; MANUFACTURER_PART_NUMBER: ERJ1GNF3001C
R62 = CRCW0201200KFNED; DESCRIPTION: VISHAY - CRCW0201200KFNED - RES, THICK FILM, 200K, 1%, 0.05W, 0201; HEIGHT: 0.28mm; MANUFACTURER_NAME: Vishay; MANUFACTURER_PART_NUMBER: CRCW0201200KFNED; MOUSER_PART_NUMBER: 71-CRCW0201200KFNED; MOUSER_PRICE-STOCK: https://www.mouser.co.uk/ProductDetail/Vishay-Dale/CRCW0201200KFNED?qs=4bbongekVIR3iw5xFt9eBQ%3D%3D
R65 = CRCW020149R9FNED; ARROW_PART_NUMBER: CRCW020149R9FNED; ARROW_PRICE-STOCK: https://www.arrow.com/en/products/crcw020149r9fned/vishay; DESCRIPTION: Thick Film;Res 49.9 Ohms; 0.05 W; 1% Vishay CRCW Series Metal Film Surface Mount Resistor 0201 Case 49.9 +/-1% 0.05W +/-100ppm/K; HEIGHT: 0.28mm; MANUFACTURER_NAME: Vishay; MANUFACTURER_PART_NUMBER: CRCW020149R9FNED; MOUSER_PART_NUMBER: 71-CRCW020149R9FNED; MOUSER_PRICE-STOCK: https://www.mouser.co.uk/ProductDetail/Vishay-Dale/CRCW020149R9FNED?qs=fkU%252BPsfhSuVmDcJrKURGdw%3D%3D
RESET = TL3780AF330QG; ARROW_PART_NUMBER: TL3780AF330QG; DESCRIPTION: Tactile Switches 20mA 15VDC 330gf SPST 2x3mm Gull SMT; HEIGHT: 0.7mm; MANUFACTURER_NAME: E-Switch; MANUFACTURER_PART_NUMBER: TL3780AF330QG; MOUSER_PART_NUMBER: 612-TL3780AF330QG; MOUSER_PRICE-STOCK: https://www.mouser.co.uk/ProductDetail/E-Switch/TL3780AF330QG?qs=367PjNmvCmlSRI7etKLFtg%3D%3D
S1 = JS102011SAQN; ALLIED_NUMBER: 71173976; ALLIED_PRICE-STOCK: https://www.alliedelec.com/c-k-js102011saqn/71173976/; DESCRIPTION: C & K COMPONENTS - JS102011SAQN - SWITCH, SPDT, 0.6A, 6VDC, SIDE, SMD; HEIGHT: mm; MANUFACTURER_NAME: C & K COMPONENTS; MANUFACTURER_PART_NUMBER: JS102011SAQN; MOUSER_PART_NUMBER: 611-JS102011SAQN; MOUSER_PRICE-STOCK: https://www.mouser.com/Search/Refine.aspx?Keyword=611-JS102011SAQN; RS_PART_NUMBER: 1543603; RS_PRICE-STOCK: http://uk.rs-online.com/web/p/products/1543603
U2 = 1051; ALLIED_NUMBER: 71135178; ALLIED_PRICE-STOCK: https://www.alliedelec.com/keystoneelectronics-1051/71135178/; DESCRIPTION: Cylindrical Battery Contacts, Clips, Holders & Springs THM BATTERY HOLDER CR123A; HEIGHT: 15.24mm; MANUFACTURER_NAME: Keystone Electronics; MANUFACTURER_PART_NUMBER: 1051; MOUSER_PART_NUMBER: 534-1051; MOUSER_PRICE-STOCK: https://www.mouser.co.uk/ProductDetail/Keystone-Electronics/1051?qs=wOxb8XianXhV6wGCGUD6gA%3D%3D
VCC3.3_AN VCC3.3_DIG = traumschreiber_custom_parts; MPN: TPS73233DBVT; OC_FARNELL: -; OC_NEWARK: 87H2968; PACKAGE: SOT-23-5; SUPPLIER: Texas Instruments

## Nets
-CHG: CHARGING.9 LED2.1
-PGOOD: CHARGING.7 LED4.1
ADC1_IN_0+: ADC3.2 CH0.MP ESD6.4 R23.1
ADC1_IN_0-: ACTIVE_REF.MP ADC3.1 ESD6.6 R24.1 R25.1 R26.1 R27.1 R28.1 R29.1 R30.1 R31.1 R32.1 R33.1 R34.1 R35.1 R36.1 R37.1 R38.1 R40.1 R42.1 R44.1 R46.1 R48.1 R50.1 R52.1 R54.1
ADC1_IN_1+: ADC3.4 CH1.MP ESD6.3 R22.1
ADC1_IN_1-: ADC3.3 R23.2 R24.2
ADC1_IN_2+: ADC3.10 CH2.MP ESD6.1 R21.1
ADC1_IN_2-: ADC3.9 R22.2 R25.2
ADC1_IN_3+: ADC3.12 CH3.MP ESD5.6 R20.1
ADC1_IN_3-: ADC3.11 R21.2 R26.2
ADC1_IN_4+: ADC3.47 CH4.MP ESD5.4 R19.1
ADC1_IN_4-: ADC3.48 R20.2 R27.2
ADC1_IN_5+: ADC3.45 CH5.MP ESD5.3 R18.1
ADC1_IN_5-: ADC3.46 R19.2 R28.2
ADC1_IN_6+: ADC3.39 CH6.MP ESD5.1 R17.1
ADC1_IN_6-: ADC3.40 R18.2 R29.2
ADC1_IN_7+: ADC3.37 CH7.MP ESD4.6 R16.1
ADC1_IN_7-: ADC3.38 R17.2 R30.2
ADC2_IN_0+: ADC2.2 CH8.MP ESD4.4 R15.1
ADC2_IN_0-: ADC2.1 R16.2 R31.2
ADC2_IN_1+: ADC2.4 CH9.MP ESD4.3 R14.1
ADC2_IN_1-: ADC2.3 R15.2 R32.2
ADC2_IN_2+: ADC2.10 CH10.MP ESD4.1 R13.1
ADC2_IN_2-: ADC2.9 R14.2 R33.2
ADC2_IN_3+: ADC2.12 CH11.MP ESD3.6 R12.1
ADC2_IN_3-: ADC2.11 R13.2 R34.2
ADC2_IN_4+: ADC2.47 CH12.MP ESD3.4 R11.1
ADC2_IN_4-: ADC2.48 R12.2 R35.2
ADC2_IN_5+: ADC2.45 CH13.MP ESD3.3 R1.1
ADC2_IN_5-: ADC2.46 R11.2 R36.2
ADC2_IN_6+: ADC2.39 CH14.MP ESD3.1 R10.1
ADC2_IN_6-: ADC2.40 R1.2 R37.2
ADC2_IN_7+: ADC2.37 CH15.MP ESD2.6 R9.1
ADC2_IN_7-: ADC2.38 R10.2 R38.2
ADC3_IN_0+: ADC1.2 CH16.MP ESD2.4 R8.1
ADC3_IN_0-: ADC1.1 R9.2 R40.2
ADC3_IN_1+: ADC1.4 CH17.MP ESD2.3 R7.1
ADC3_IN_1-: ADC1.3 R8.2 R42.2
ADC3_IN_2+: ADC1.10 CH18.MP ESD2.1 R6.1
ADC3_IN_2-: ADC1.9 R7.2 R44.2
ADC3_IN_3+: ADC1.12 CH19.MP ESD1.6 R5.1
ADC3_IN_3-: ADC1.11 R6.2 R46.2
ADC3_IN_4+: ADC1.47 CH20.MP ESD1.4 R4.1
ADC3_IN_4-: ADC1.48 R5.2 R48.2
ADC3_IN_5+: ADC1.45 CH21.MP ESD1.3 R3.1
ADC3_IN_5-: ADC1.46 R4.2 R50.2
ADC3_IN_6+: ADC1.39 CH22.MP ESD1.1 R2.1
ADC3_IN_6-: ADC1.40 R3.2 R52.2
ADC3_IN_7+: ADC1.37 CH23.MP ESD7.6
ADC3_IN_7-: ADC1.38 R2.2 R54.2
AGND [power]: ADC1.5 ADC1.7 ADC1.42 ADC1.44 ADC1.50 ADC1.53 ADC1.60 ADC1.61 ADC1.64 ADC1.65 ADC2.5 ADC2.7 ADC2.42 ADC2.44 ADC2.50 ADC2.53 ADC2.60 ADC2.61 ADC2.64 ADC2.65 ADC3.5 ADC3.7 ADC3.42 ADC3.44 ADC3.50 ADC3.53 ADC3.60 ADC3.61 ADC3.65 C1.2 C2.1 C3.1 C4.2 C5.1 C6.2 C7.2 C8.2 C9.2 C10.1 C11.2 C12.1 C13.1 C14.2 C15.2 C16.1 C17.1 C18.2 C19.1 C20.1 C21.1 C22.1 C23.1 C24.1 C25.1 C26.2 C27.2 C28.2 C29.1 C30.1 C31.1 C32.2 C33.1 C37.2 C38.2 C39.1 C40.1 C51.1 C55.1 C56.1 C57.2 C64.1 C65.1 C66.2 C67.1 C68.1 C69.1 C70.1 C71.2 C72.1 C73.1 C74.1 C75.1 C77.1 C78.2 C79.1 C81.2 C82.1 C83.1 C84.1 C85.1 C86.2 C87.2 CHARGING.4 CHARGING.5 CHARGING.8 CHARGING.15 CHARGING.17 D1.3 ESD1.2 ESD2.2 ESD3.2 ESD4.2 ESD5.2 ESD6.2 ESD7.2 J3.5 R39.2 R49.2 R51.1 R53.1 R56.1 R58.2 R65.1 S1.3 U2.2 VCC3.3_AN.2 VCC3.3_DIG.2
AGND-SUBJECTGROUND [power]: ESD7.1 R45.1 SUBJECT_GND.MP
CS_ADC1: ADC3.18 BC832.A4
CS_ADC2: ADC2.18 BC832.A5
CS_ADC3: ADC1.18 BC832.C1
DGND: ADC1.13 ADC1.14 ADC1.15 ADC1.16 ADC1.22 ADC1.31 ADC1.56 ADC2.13 ADC2.14 ADC2.15 ADC2.16 ADC2.22 ADC2.31 ADC2.56 ADC3.13 ADC3.14 ADC3.15 ADC3.16 ADC3.22 ADC3.31 ADC3.56 BC832.1 CLOCK.2 J1.3 J1.5 J1.9 R39.1 RESET.2
DRDY_ADC1: ADC3.30 BC832.A2
DRDY_ADC2: ADC2.30 BC832.D4
DRDY_ADC3: ADC1.30 BC832.B1
MEASURE_VBATM: ADC2.63 R55.1 R56.2
MEASURE_VUSB: ADC1.63 R49.1 R57.1
N$1: ADC3.59 C1.1
N$2: ADC2.23 C12.2
N$3: C22.2 D1.2 R45.2
N$4: C5.2 VCC3.3_DIG.4
N$6: BC832.2 LED1.1
N$7: ADC3.63 ADC3.64
N$8: ADC3.51 C7.1
N$10: LED3.2 R68.1
N$11: LED1.2 R69.1
N$12: LED4.2 R41.1
N$13: ADC2.51 C15.1
N$14: ADC3.23 C14.1
N$16: ADC1.23 C13.2
N$17: LED2.2 R43.1
N$19: C57.1 VCC3.3_AN.4
N$21: ADC1.59 C32.1
N$22: ADC2.59 C26.1
N$26: ADC1.51 C18.1
N$39: CHARGING.1 R62.1 R65.2
N$53: CHARGING.14
N$58: CHARGING.16 R53.2
N$60: CHARGING.12 R51.2
P18/LED: BC832.5 J1.6 LED3.1
POWERUP: S1.2 VCC3.3_AN.3 VCC3.3_DIG.3
REF_ADC1: ADC3.8 ADC3.41 ADC3.49 C8.1 C21.2 C65.2 C70.2 C81.1
REF_ADC2: ADC2.8 ADC2.41 ADC2.49 C27.1 C29.2 C64.2 C71.1 C74.2
REF_ADC3: ADC1.8 ADC1.41 ADC1.49 C38.1 C51.2 C83.2 C85.2 C87.1
RESET: BC832.10 J1.10 RESET.1
RESET_ADC: ADC1.36 ADC2.36 ADC3.36 BC832.D1
SDCLK: BC832.4 J1.4
SDI_ADC1: ADC3.20 BC832.C4
SDI_ADC2: ADC2.20 BC832.B5
SDI_ADC3: ADC1.20 BC832.A1
SDIO: BC832.3 J1.2
SDO_ADC1: ADC3.21 BC832.D3
SDO_ADC2: ADC2.21 BC832.B4
SDO_ADC3: ADC1.21 BC832.B2
SHIELD: J3.S4 J3.S5 J3.SH1 J3.SH2 J3.SH3 J3.SH4
SLCK_ADC1: ADC3.19 BC832.A3
SLCK_ADC2: ADC2.19 BC832.D2
SLCK_ADC3: ADC1.19 BC832.C2
START_ADC: ADC3.33 BC832.D5
SYNC_ADC: ADC1.35 ADC2.35 ADC3.34 ADC3.35
USB_5VOLT+ [power]: CHARGING.13 J3.1 R57.2 R62.2
V_OUT_CHARGER [power2]: C19.2 C56.2 CHARGING.6 CHARGING.10 CHARGING.11 R41.2 R43.2 S1.1 VCC3.3_AN.1 VCC3.3_DIG.1
VCC3.3_AN [power2]: ADC1.6 ADC1.43 ADC1.52 ADC1.58 ADC1.62 ADC2.6 ADC2.43 ADC2.52 ADC2.58 ADC2.62 ADC3.6 ADC3.43 ADC3.52 ADC3.58 ADC3.62 C2.2 C11.1 C16.2 C17.2 C23.2 C24.2 C25.2 C28.1 C30.2 C31.2 C37.1 C39.2 C40.2 C66.1 C67.2 C68.2 C69.2 C72.2 C73.2 C75.2 C77.2 C78.1 C79.2 C82.2 C84.2 C86.1 D1.1 ESD7.3 R47.1 VCC3.3_AN.5
VCC3.3_DIG [power2]: ADC1.24 ADC1.33 ADC1.54 ADC1.55 ADC2.24 ADC2.33 ADC2.54 ADC2.55 ADC3.24 ADC3.54 ADC3.55 BC832.16 C3.2 C4.1 C6.1 C9.1 C10.2 C20.2 CLOCK.4 ESD7.4 J1.1 R68.2 R69.2 VCC3.3_DIG.5
VCC_BATTERY [power2]: C55.2 CHARGING.2 CHARGING.3 R55.2 U2.1
VIRTUAL_GND_PASSIVE: C33.2 R47.2 R58.1 SUBJECT_GND_VD.MP
XTAL_OUT: ADC1.32 ADC2.32 ADC3.32 CLOCK.3

## Tracks (layer width: path | path; a pad name or v marks a point on that pad's centre or on a via)
-CHG  (via drill 0.38)
  Top 0.152: LED2.1 22.84,14.42 v22.84,13.13 22.84,13.03 | v22.06,11.26 22.06,10.05 CHARGING.9
  Route15 0.152: v22.84,13.13 22.84,12.22 22.03,11.41 22.03,11.3 v22.06,11.26
-PGOOD
  Top 0.152: LED4.1 23.97,12.34 23.36,11.73 23.36,10.84 CHARGING.7
ADC1_IN_0+  (via drill 0.38)
  Top 0.152: ADC3.2 45.67,22.96 45.67,22.46 45.47,22.25 45.47,22.04 v45.49,22.02
  Route2 0.152: v49.95,36.68 50.19,36.43 50.19,27.64 48.81,26.25 48.67,26.25 47.96,25.54 47.96,25.11 46.07,23.21 46.07,22.6 v45.49,22.02
  Bottom 0.152: CH0.MP R23.1 57.05,42.3 57.05,40.26 56.47,40.26 54.57,38.36 53.57,38.36 ESD6.4 53.06,38.45 52.8,38.19 52.8,35.8 52.56,35.56 51.06,35.56 v49.95,36.68
ADC1_IN_0-  (via drill 0.38)
  Top 0.152: ADC3.1 44.92,22.7 v44.92,20.79 v44.91,20.78 | R38.1 19.56,43.07 19.56,44.12 | 19.56,44.12 22.18,44.12 | 22.18,44.12 24.54,44.12 | 24.54,44.12 27.21,44.12 | 27.21,44.12 29.65,44.12 | 29.65,44.12 32.21,44.12 | 32.21,44.12 34.8,44.12 | 34.8,44.12 37.29,44.12 | 37.29,44.12 39.81,44.12 | 39.81,44.12 42.37,44.12 | 42.37,44.12 44.94,44.12 | 44.94,44.12 47.55,44.12 | 47.55,44.12 50.02,44.12 | 50.02,44.12 52.46,44.12 | 52.46,44.12 53.97,44.12 | 53.97,44.12 R24.1 | R37.1 22.18,43.14 22.18,44.12 | R36.1 24.59,44.07 24.54,44.12 | R35.1 27.13,44.04 27.21,44.12 | R34.1 29.67,44.09 29.65,44.12 | R33.1 32.21,44.12 | R32.1 34.75,44.07 34.8,44.12 | R31.1 37.29,44.12 | R30.1 39.83,44.09 39.81,44.12 | R29.1 42.37,44.12 | R28.1 44.91,44.09 44.94,44.12 | R27.1 47.45,44.02 47.55,44.12 | R26.1 49.99,44.09 50.02,44.12 | R25.1 52.53,44.04 52.46,44.12 | 53.97,44.12 57,44.12 57.54,43.59 57.54,38.51 ACTIVE_REF.MP | R42.1 8.2,48.97 7.22,48.97 | 7.22,46.61 7.22,48.97 | 7.22,46.61 7.22,43.99 | 7.22,43.99 7.22,41.4 | 7.22,41.4 7.22,38.76 | 7.22,38.76 7.22,36.35 | 7.22,36.35 7.22,33.83 R54.1 | R52.1 8.37,36.35 7.22,36.35 | R50.1 8.25,38.76 7.22,38.76 | R48.1 8.35,41.4 7.22,41.4 | R46.1 7.22,43.99 | R44.1 7.29,46.53 7.22,46.61 | 7.22,48.97 8.16,49.91 10.88,49.91 16.87,43.92 | 19.56,44.12 16.95,44.12 16.87,44.04 16.87,43.92 | 16.87,43.92 R40.1
  Route2 0.152: v49.48,35.99 49.48,35.25 49.89,34.84 49.89,27.76 48.68,26.55 48.55,26.55 47.66,25.66 47.66,25.23 44.91,22.48 v44.91,20.78
  Bottom 0.152: ESD6.6 56.1,37.45 ACTIVE_REF.MP 56.29,36.58 54.97,35.26 50.22,35.26 v49.48,35.99
ADC1_IN_1+  (via drill 0.38)
  Top 0.152: ADC3.4 46.67,22.96 v46.67,21.13
  Route2 0.152: v46.67,21.13 46.67,22.96 48.6,24.89 48.6,25.33 48.92,25.64 49.06,25.64 50.83,27.42 50.83,37.15 51.44,37.75 51.44,38.86 51.52,38.94 v51.52,38.99
  Bottom 0.152: 53.8,43.07 R22.1 | CH1.MP 53.83,48.54 R22.1 | v51.52,38.99 51.89,38.62 ESD6.3 52.56,38.45 52.94,38.82 53.41,38.82 54.54,39.95 54.53,39.96 54.53,42.34 R22.1
ADC1_IN_1-  (via drill 0.38)
  Top 0.152: ADC3.3 46.1,22.88 46.1,21.48 45.82,21.19 45.82,20.81 v45.79,20.79 | 55.07,41.61 R24.2 55.6,40.88 v55.6,40.19
  Route2 0.152: v45.79,20.79 45.79,21.18 46.11,21.49 46.37,21.76 46.37,23.09 48.26,24.98 48.26,25.41 48.8,25.95 48.93,25.95 50.51,27.53 50.51,37.59 49.74,38.36 49.74,42.42 50.3,42.98 53.71,42.98 55.6,41.08 v55.6,40.19
  Bottom 0.152: R23.2 56.34,41.01 55.6,40.27 v55.6,40.19
ADC1_IN_2+  (via drill 0.38)
  Top 0.152: ADC3.10 49.7,22.14 49.8,22.03 v49.8,21.95
  Route2 0.152: v49.8,21.95 49.7,22.05 49.7,24.41 51.44,26.14 51.44,35.46 v52.19,36.21
  Bottom 0.152: CH2.MP R21.1 51.96,42.31 51.96,40.3 50.19,38.53 50.19,37.59 50.35,37.43 51.12,37.43 51.13,37.45 ESD6.1 51.9,37.44 51.9,36.6 52.19,36.31 v52.19,36.21
ADC1_IN_2-  (via drill 0.38)
  Top 0.152: ADC3.9 49.2,22.41 49.26,22.35 49.26,21.9 49.23,21.87 49.23,20.9 v49.33,21.01 | R25.2 53.06,40.88 v53.06,40.22
  Route2 0.152: v49.33,21.01 49.26,21.01 49.26,24.39 51.13,26.26 51.13,36.07 51.94,36.88 52.07,36.88 53.06,37.87 v53.06,40.22
  Bottom 0.152: R22.2 53.06,40.68 v53.06,40.22
ADC1_IN_3+  (via drill 0.38)
  Top 0.152: ADC3.12 50.75,22.93 50.75,21.92 v51.04,21.92 | v52.69,33.63 51.19,33.63 50.06,34.75 49.96,34.75 48.85,35.86 48.85,37 v48.87,37.03
  Route2 0.152: 48.75,48.54 CH3.MP | v51.04,21.92 50.8,22.15 50.8,24.65 52.04,25.89 52.04,28.12 52.14,28.21 52.55,28.21 52.87,28.53 52.87,28.98 52.55,29.3 52.1,29.3 52.1,29.29 52.04,29.29 52.04,33.46 52.22,33.63 v52.69,33.63
  Bottom 0.152: ESD5.6 47.04,37.46 48.44,37.46 v48.87,37.03 49.42,37.58 49.42,42.31 R20.1 CH3.MP
ADC1_IN_3-  (via drill 0.38)
  Top 0.152: ADC3.11 50.2,22.42 50.37,22.25 50.37,21.57 50.27,21.47 v50.27,21.01 | R26.2 49.99,41.55 49.84,41.41 50.65,40.6 v50.65,40.09
  Route2 0.152: v50.27,21.01 50.37,21.11 50.37,24.64 51.74,26.01 51.74,34.92 53.75,36.93 53.75,41.98 50.91,41.98 50.65,41.72 v50.65,40.09 50.7,40.05
  Bottom 0.152: R21.2 51.26,40.7 v50.65,40.09
ADC1_IN_4+  (via drill 0.38)
  Top 0.152: ADC3.47 45.58,32.01 45.58,32.4 45.22,32.76 43.45,32.76 42.45,33.76 42.45,39.68 42.79,40.02 v42.79,40.06
  Route2 0.152: CH4.MP 45.63,46.03 42.29,42.68 42.29,41.6 42.79,41.09 v42.79,40.06
  Bottom 0.152: 47.13,38.45 ESD5.4 47.03,42.17 R19.1 CH4.MP
ADC1_IN_4-  (via drill 0.38)
  Top 0.152: R27.2 48.16,40.7 v48.16,40.12 | ADC3.48 45,32.08 44.07,32.08 43.73,32.42 v42.9,32.42
  Route2 0.152: v42.9,32.42 44.97,32.42 45.56,33.01 47.14,33.01 47.15,33.02 47.15,40.12 v48.16,40.12
  Bottom 0.152: R20.2 48.16,40.86 v48.16,40.12
ADC1_IN_5+  (via drill 0.38)
  Top 0.152: ADC3.45 46.58,32.01 46.58,32.43 45.63,33.37 43.77,33.37 43.08,34.06 43.08,37.79 44,38.71 v44,38.86
  Bottom 0.152: CH5.MP R18.1 44.35,42.3 44.35,39.42 44.92,38.86 | 45.49,38.5 ESD5.3 45.33,38.45 44.92,38.86 | v44,38.86 44.92,38.86
ADC1_IN_5-  (via drill 0.38)
  Top 0.152: 45.62,40.21 v45.62,40.09 45.62,40.7 R28.2 44.91,40.55 42.77,38.41 42.77,33.89 43.59,33.07 45.39,33.07 45.93,32.53 45.94,32.53 46.08,32.4 46.08,32.01 ADC3.46
  Route15 0.152: 45.65,40.07 v45.62,40.09
  Bottom 0.152: R19.2 46.18,40.68 45.61,40.11 v45.62,40.09
ADC1_IN_6+  (via drill 0.38)
  Top 0.152: ADC3.39 49.58,32.01 49.58,33.85 47.06,33.85 46.44,34.46 45.34,34.46 45.34,36.3 v45.29,36.35
  Bottom 0.152: CH6.MP 41.1,43.02 R17.1 41.94,42.18 41.94,37.6 42.16,37.38 44.28,37.38 44.37,37.47 45.41,37.47 ESD5.1 45.43,36.49 v45.29,36.35
ADC1_IN_6-  (via drill 0.38)
  Top 0.152: R29.2 42.37,41.68 43.72,43.03 v43.72,40.14 | ADC3.40 49.2,32.3 49.24,32.35 49.24,33.52 46.93,33.52 46.31,34.14 44.76,34.14 44.51,34.39 v44.73,34.62
  Route2 0.152: v44.73,34.62 44.73,37.49 44.78,37.54 44.78,39.08 v43.72,40.14
  Bottom 0.152: v43.72,40.14 43.64,40.22 R18.2
ADC1_IN_7+  (via drill 0.38)
  Top 0.152: ADC3.37 50.58,32.01 50.58,33.81 49.94,34.45 49.82,34.45 48.9,35.37 v48.32,35.37
  Bottom 0.152: ESD4.6 37.15,37.34 39.25,37.34 | v48.31,35.37 v48.32,35.37 45.08,35.37 43.68,36.78 41.91,36.78 41.34,37.34 39.25,37.34 | 39.25,37.34 39.26,37.36 39.26,42.31 R16.1 CH7.MP
ADC1_IN_7-  (via drill 0.38)
  Top 0.152: R30.2 40.69,40.56 v40.69,40.14 | ADC3.38 50.08,32.01 50.08,33.78 49.71,34.15 47.76,34.15 v47.76,35.93
  Bottom 0.152: v40.69,40.14 41.13,40.58 R17.2 41.13,40.58 41.63,40.07 41.63,37.48 42.03,37.08 43.8,37.08 45.07,35.81 47.64,35.81 v47.76,35.93
ADC2_IN_0+  (via drill 0.38)
  Top 0.152: ADC2.2 31.27,22.86 31.27,21.95 v31.17,21.95
  Route2 0.152: v31.17,21.95 31.14,21.97 31.14,22.94 32.1,23.89 32.1,24.97 31.42,25.65 31.42,38.53 32.55,39.66 34.48,39.66 34.72,39.89 v34.76,39.89
  Bottom 0.152: CH8.MP R15.1 36.78,42.25 36.78,39.57 | ESD4.4 36.78,38.32 36.78,39.57 | v34.76,39.89 35.12,39.54 36.75,39.54 36.78,39.57
ADC2_IN_0-  (via drill 0.38)
  Top 0.152: v30.62,21.25 30.62,22.7 ADC2.1 | R31.2 37.29,40.64 37.79,40.14 v37.95,40.14
  Route2 0.152: v30.62,21.25 30.62,22.87 31.8,24.05 31.8,24.85 31.12,25.53 31.12,41.37 32.93,43.18 36.35,43.18 37.95,41.58 v37.95,40.14
  Bottom 0.152: R16.2 38.56,40.75 v37.95,40.14
ADC2_IN_1+  (via drill 0.38)
  Top 0.152: ADC2.4 32.37,22.7 32.41,22.73 32.41,21.51 v32.31,21.42
  Route2 0.152: v32.31,21.42 32.31,23.25 32.71,23.64 32.71,25.22 32.03,25.9 32.03,37.97 32.67,38.61 v32.72,38.61
  Bottom 0.152: CH9.MP R14.1 34.22,42.28 34.22,38.32 | 34.22,38.32 ESD4.3 | v32.72,38.61 33.93,38.61 34.22,38.32
ADC2_IN_1-  (via drill 0.38)  (1 unrouted)
  Top 0.152: ADC2.3 31.87,22.55 31.75,22.42 31.75,21.48 v31.51,21.24 | R32.2 34.75,40.98 v35.46,40.27
  Route2 0.152: v31.51,21.24 31.76,21.24 31.76,23.13 32.4,23.77 32.4,25.1 31.72,25.78 31.72,38.4 32.47,39.15 34.81,39.15 35.46,39.8 v35.46,40.27
  Bottom 0.152: R15.2 36.02,40.83 v35.46,40.27
ADC2_IN_2+  (via drill 0.38)
  Top 0.152: ADC2.10 35.37,22.02 v35.48,22.02
  Route2 0.152: v35.48,22.02 35.48,26.98 35.88,27.38 35.88,27.69 36.66,28.47 36.66,33.02 | 36.66,33.02 | 36.66,33.02 36.66,34.99 36.2,35.44 36.2,36.71 v36.28,36.79
  Bottom 0.152: CH10.MP R13.1 31.47,43.02 32.16,42.33 32.16,37.11 32.18,37.09 35.3,37.09 ESD4.1 36.12,37.32 36.12,36.99 36.28,36.84 v36.28,36.79
ADC2_IN_2-  (via drill 0.38)
  Top 0.152: ADC2.9 34.87,22.49 34.94,22.43 34.94,21.55 34.93,21.54 34.93,21.31 v34.95,21.29 | R33.2 32.8,40.83 32.8,40.37 v32.95,40.22
  Route2 0.152: v34.95,21.29 34.94,21.3 34.94,26.84 34.6,27.18 34.6,27.63 34.91,27.95 35.7,27.95 36.35,28.6 36.35,32.89 36.35,32.9 36.35,34.73 35.59,35.5 35.59,39.01 36.63,40.06 36.63,41.1 33.83,41.1 v32.95,40.22
  Bottom 0.152: R14.2 33.48,40.75 v32.95,40.22
ADC2_IN_3+  (via drill 0.38)
  Top 0.152: ADC2.12 36.37,22.23 36.56,22.04 v36.56,22.01
  Route2 0.152: v36.56,22.01 36.56,24.36 37.26,25.06 37.26,33.67 37.29,33.7 37.29,35.91 v37.52,36.14
  Bottom 0.152: ESD3.6 29.96,37.27 29.96,42.34 | 29.96,42.34 29.96,44.73 28.4,44.73 CH11.MP R12.1 | 29.96,42.34 31.43,42.34 31.5,42.27 31.5,42.1 31.64,41.96 31.64,40.87 31.2,40.42 31.2,37.64 32.04,36.79 35.51,36.79 36.05,36.25 37.42,36.25 v37.52,36.14
ADC2_IN_3-  (via drill 0.38)
  Top 0.152: ADC2.11 35.87,22.49 36.02,22.34 36.02,21.79 | R34.2 30.22,41.42 30.46,41.17 30.46,40.21 v30.51,40.16 | 36.03,21.77 36.02,21.79 | 36.02,21.79 36.02,21.29 v36.05,21.26
  Route2 0.152: v36.05,21.26 36.05,21.76 36.02,21.79 36.02,22.66 36.26,22.9 36.26,27.04 36.18,27.12 36.18,27.57 36.96,28.35 36.96,35.79 36.94,35.81 36.87,35.81 v36.74,35.69
  Bottom 0.152: R13.2 30.51,40.98 v30.51,40.16 30.51,37.82 31.84,36.49 35.38,36.49 35.93,35.94 36.64,35.94 36.8,35.79 36.8,35.74 v36.74,35.69
ADC2_IN_4+  (via drill 0.38)
  Top 0.152: ADC2.47 31.25,31.98 31.25,32.4 29.5,34.15 v29.5,34.91
  Route2 0.152: v29.42,38.68 29.57,38.68 29.57,34.98 v29.5,34.91
  Bottom 0.152: CH12.MP R11.1 27.66,41.21 27.66,38.33 ESD3.4 29,38.27 v29.42,38.68
ADC2_IN_4-  (via drill 0.38)
  Top 0.152: R35.2 27.41,41.42 27.61,41.21 27.61,41.06 v28.4,40.27 | ADC2.48 30.87,32.26 28.69,34.44 v28.69,34.96
  Route2 0.152: v28.69,34.96 28.36,34.96 28.36,40.23 v28.4,40.27
  Bottom 0.152: v28.4,40.27 R12.2
ADC2_IN_5+  (via drill 0.38)
  Top 0.152: ADC2.45 32.37,32.31 32,32.69 32,34.94 31.4,35.54 27.18,35.54 v27.13,35.59
  Bottom 0.152: CH13.MP R1.1 23.47,43.02 25.05,41.44 25.05,40.98 26.05,39.97 26.05,38.35 ESD3.3 26.25,38.15 26.68,38.15 27.05,37.77 27.05,37.03 27.06,37.02 27.06,35.66 v27.13,35.59
ADC2_IN_5-  (via drill 0.38)
  Top 0.152: R36.2 24.96,41.78 v26.6,40.14 | ADC2.46 31.75,31.98 31.75,32.38 30.56,33.56 30.57,33.58 v30.57,34.66
  Route2 0.152: v30.57,34.66 29.97,35.27 29.97,39.68 28.83,40.81 28.18,40.81 27.51,40.14 v26.6,40.14
  Bottom 0.152: v26.6,40.14 25.86,40.88 R11.2
ADC2_IN_6+  (via drill 0.38)
  Top 0.152: ADC2.39 35.37,35.81 35.01,36.17 29.61,36.17 28.98,36.8 25.15,36.8 24.69,37.27 v24.64,37.27
  Bottom 0.152: CH14.MP R10.1 22.05,41.75 22.05,40.46 23.88,38.63 23.88,38.03 v24.64,37.27 ESD3.1
ADC2_IN_6-  (via drill 0.38)
  Top 0.152: 22.05,41.61 R37.2 22.35,41.42 v23.4,40.37 23.89,39.88 23.89,37.18 24.57,36.5 27.24,36.5 27.82,35.91 28.4,35.91 28.44,35.87 34.88,35.87 35.07,35.68 35.07,32.58 34.87,32.38 ADC2.40
  Bottom 0.152: R1.2 23.4,41.34 v23.4,40.37
ADC2_IN_7+  (via drill 0.38)
  Top 0.152: ADC2.37 36.37,35.22 36.2,35.39 36.2,35.84 35.26,36.78 29.86,36.78 29.11,37.53 26.05,37.53 26.05,40.03 25.69,40.38 24.95,40.38 v24.9,40.33
  Route2 0.152: v24.9,40.33 24.83,40.41 24.59,40.41 24.59,43.23 18.24,43.23 CH15.MP
  Bottom 0.152: CH15.MP 18.24,48.49 | 18.24,48.49 R9.1 | 18.24,48.49 15.32,48.49 ESD2.6
ADC2_IN_7-  (via drill 0.38)
  Top 0.152: R38.2 19.63,41.54 20.1,41.07 20.1,40.19 v20.17,40.12 | ADC2.38 35.87,35.72 35.88,35.73 35.13,36.48 29.74,36.48 29.11,37.11 25.59,37.11 24.22,38.47 24.22,39.55 24.3,39.63 v24.47,39.63
  Route2 0.152: v24.47,39.63 24.47,39.68 23.96,40.2 23.96,41.1 22.47,41.1 21.49,40.12 v20.17,40.12
  Bottom 0.152: R10.2 20.78,40.73 v20.17,40.12
ADC3_IN_0+  (via drill 0.38)
  Top 0.152: ADC1.2 17.28,22.28 17.11,22.11 v17.11,21.91
  Route2 0.152: v17.11,21.91 17.11,23.99 16.84,24.26 16.84,24.91 17.05,25.13 18.46,25.13 19.39,26.06 19.39,28.71 17.66,30.43 17.66,34.4 14.49,37.57 13.34,37.57 12.56,38.35 12.56,40.89 11.8,41.65 11.8,45.76 11.74,45.82 11.69,45.87 11.38,46.18 v11.23,46.18
  Bottom 0.152: CH16.MP 6.25,48.49 6.94,47.8 R8.1 9.14,47.07 10.62,47.07 10.62,46.81 | 10.62,46.81 12.15,48.34 12.15,49.48 13.33,49.48 ESD2.4 | v11.23,46.18 10.62,46.79 10.62,46.81
ADC3_IN_0-  (via drill 0.38)
  Top 0.152: ADC1.1 16.78,22.61 16.56,22.39 16.56,21.56 16.39,21.39 v16.51,21.26 | R40.2 16.87,40.97 17.35,40.49 17.36,40.49 v17.84,40.49
  Route2 0.152: v16.51,21.26 16.44,21.34 16.44,25.02 16.85,25.43 18.33,25.43 19.09,26.19 19.09,28.58 17.36,30.31 17.36,33.94 14.56,36.74 v14.55,36.72
  Bottom 0.152: 18.32,41.34 R9.2 17.84,41.42 v17.84,40.49 15.05,40.49 14.83,40.27 14.83,37 v14.55,36.72
ADC3_IN_1+  (via drill 0.38)
  Top 0.152: ADC1.4 18.28,22.24 18.28,21.83 v18.27,21.82
  Route2 0.152: v18.27,21.82 18.27,23.98 19.99,25.71 19.99,28.96 18.27,30.68 18.27,34.65 14.74,38.17 13.59,38.17 13.16,38.6 13.16,41.14 12.4,41.9 12.4,45.03 12.42,45.06 12.42,46.61 v12.32,46.71
  Bottom 0.152: CH17.MP 6.61,45.95 7.29,45.26 R7.1 9.16,44.5 11,44.5 12.81,46.3 | 12.81,46.3 13.35,46.85 ESD2.3 | v12.32,46.71 12.73,46.3 12.81,46.3
ADC3_IN_1-  (via drill 0.38)
  Top 0.152: R42.2 10.71,48.46 v11.3,48.46 | v17.7,21.25 17.7,22.98 ADC1.3
  Route2 0.152: 12.12,46.13 12.1,46.15 | v11.3,48.46 11.3,46.95 12.06,46.19 12.1,46.15 | v17.7,21.25 17.7,23.84 19.69,25.83 19.69,28.83 17.96,30.56 17.96,34.52 14.62,37.87 13.52,37.87 13.46,37.87 12.86,38.47 12.86,41.01 12.1,41.77 12.1,46.15
  Bottom 0.152: R8.2 10.66,48.46 v11.3,48.46 11.13,48.46
ADC3_IN_2+  (via drill 0.38)
  Top 0.152: ADC1.10 21.28,22.58 21.34,22.52 21.34,21.62 v21.34,21.24 v21.33,21.23
  Route2 0.152: v21.33,21.23 21.36,21.26 21.36,22.65 21.7,23 21.7,27.73 20.92,28.51 20.92,32.53 21.14,32.75 21.14,35.72 20.38,36.48 18.77,36.48 13.03,42.22 13.03,44.2 13.26,44.43 v13.29,44.43
  Bottom 0.152: CH18.MP 5.54,43.41 6.23,42.72 R6.1 8.75,42.72 9.46,42.02 10.66,42.02 11.73,43.1 11.73,44.43 | 14.33,48.01 14.35,47.99 ESD2.1 14.35,47.36 11.73,44.74 11.73,44.43 | v13.29,44.43 11.73,44.43
ADC3_IN_2-  (via drill 0.38)
  Top 0.152: ADC1.9 20.78,22.65 21.04,22.39 21.04,21.85 20.55,21.36 v20.55,21.23 | v12.97,45.22 12.88,45.31 v11.02,45.31 10,46.33 R44.2
  Route2 0.152: v20.55,21.23 20.55,21.46 21.04,21.94 21.04,22.39 20.62,22.81 20.62,32.65 20.84,32.87 20.84,33.32 20.83,33.33 20.83,35.6 20.25,36.18 18.64,36.18 12.73,42.09 | v12.97,45.22 12.97,45.18 12.73,44.93 12.73,42.09 | 12.73,42.09
  Bottom 0.152: v11.02,45.31 10.05,45.31 R7.2 10.1,45.16
ADC3_IN_3+  (via drill 0.38)
  Top 0.152: ADC1.12 22.36,22.98 22.36,22.41 22.44,22.32 22.44,21.87 22.36,21.79 22.36,21.44 22.34,21.42 v22.33,21.42
  Route2 0.152: v22.33,21.42 22.33,21.76 22.44,21.87 22.44,24.25 22.31,24.38 22.31,26.49 23.1,27.28 23.1,28.44 21.82,29.72 21.82,35.89 20.63,37.08 19.02,37.08 14.79,41.31 14.79,42.85 v14.89,42.95
  Bottom 0.152: CH19.MP 6.15,40.87 6.86,40.16 8.37,40.16 R5.1 8.75,40.18 9.46,39.48 12.26,39.48 12.6,39.83 12.6,43.18 14.2,43.18 14.37,43.01 | 14.37,43.01 ESD1.6 | v14.89,42.95 14.43,42.95 14.37,43.01
ADC3_IN_3-  (via drill 0.38)
  Top 0.152: 21.78,22.25 21.9,22.12 v21.9,22.1 21.78,22.22 ADC1.11 | R46.2 9.36,43.36 9.28,43.36 9.48,43.56 v11.12,43.56 13.73,43.56 v13.73,43.77
  Route2 0.152: v21.9,22.1 21.9,22.76 22.01,22.87 22.01,27.86 21.23,28.64 21.23,32.4 21.45,32.62 21.45,32.82 21.52,32.89 21.52,35.77 20.5,36.78 18.89,36.78 13.44,42.23 13.44,43.48 v13.73,43.77
  Bottom 0.152: v11.12,43.56 10.28,42.72 R6.2
ADC3_IN_4+  (via drill 0.38)
  Top 0.152: ADC1.47 17.28,32.72 13.42,32.72 v13.24,32.54
  Route2 0.152: v13.24,32.54 12.53,33.25 12.53,36.65 v12.27,36.91
  Bottom 0.152: ESD1.4 13.37,41.12 12.97,40.72 12.97,37.35 12.56,36.94 12.32,36.94 | 12.32,36.94 12.24,36.94 v12.27,36.91 | CH20.MP 5.64,38.33 6.38,37.59 8.35,37.59 R4.1 9.1,36.94 10.63,36.94 10.98,37.29 11.98,37.29 12.32,36.94
ADC3_IN_4-  (via drill 0.38)
  Top 0.152: R48.2 9.29,40.74 10.61,40.74 v11.04,41.17 | ADC1.48 16.78,32.4 16.79,32.42 14.36,32.42 14.15,32.21 14.15,31.8 14.13,31.78 v14.04,31.78
  Route2 0.152: v14.04,31.78 13.83,31.99 13.01,31.99 12.2,32.81 12.2,35.92 11.75,36.36 11.73,36.36 11.73,37.99 12.25,38.51 12.25,39.75 11.87,40.13 10.95,40.13 | 10.95,40.13 v10.98,40.16 | 10.95,40.13
  Bottom 0.152: v11.04,41.17 10.05,40.18 R5.2 10.05,40.13 10.98,40.13 v10.98,40.16
ADC3_IN_5+  (via drill 0.38)
  Top 0.152: ADC1.45 18.15,32.08 18.15,32.85 17.68,33.32 14.41,33.32 14.11,33.62 v14,33.62
  Route2 0.152: v14,33.62 14,33.74 13.38,34.37 v13.38,36.97
  Bottom 0.152: CH21.MP 6.51,35.79 7.22,35.08 8.37,35.08 R3.1 8.75,35.1 9.46,34.4 12.33,34.4 13.38,35.45 v13.38,36.97 13.3,36.97 13.3,40.12 ESD1.3
ADC3_IN_5-  (via drill 0.38)
  Top 0.152: v11.09,38.28 10.46,38.91 R50.2 | ADC1.46 17.76,31.98 17.76,32.82 17.56,33.02 13.52,33.02 13.21,33.33 v13.21,33.61
  Route2 0.152: v13.21,33.61 13.21,33.93 12.83,34.32 12.83,37.64 12.48,37.64 v12.43,37.69
  Route15 0.152: 11.12,38.3 v11.09,38.28
  Bottom 0.152: v12.43,37.69 12.38,37.64 R4.2 | R4.2 | v11.09,38.28 10.46,37.64 R4.2
ADC3_IN_6+  (via drill 0.38)
  Top 0.152: ADC1.39 21.28,35.5 20.45,36.33 15.78,36.33 15.02,35.57 14.24,35.57 v13.95,35.28
  Bottom 0.152: CH22.MP 6.43,33.25 7.29,32.39 R2.1 9.16,31.65 11.36,31.65 11.99,32.28 11.99,33.58 13.58,35.17 13.95,35.17 v13.95,35.28 13.95,35.62 13.97,35.64 | ESD1.1 14.45,40.12 14.45,37.66 13.97,37.18 13.97,35.64 | 13.97,35.64 13.97,35.56
ADC3_IN_6-  (via drill 0.38)
  Top 0.152: R52.2 10.1,36.47 v11.14,36.47 | ADC1.40 20.78,32.81 20.84,32.87 20.84,33.32 20.78,33.38 20.78,34.7 19.45,36.02 15.9,36.02 15.15,35.27 14.71,35.27 14.13,34.7 11.92,34.7 11.59,35.03 v11.59,35.08
  Bottom 0.152: v11.14,36.47 10,35.33 R3.2 11.54,35.1 11.55,35.12 v11.59,35.08
ADC3_IN_7+
  Top 0.152: ADC1.37 22.28,32.03 22.25,32.06 22.25,35.87 21.19,36.93 15.53,36.93 14.77,36.17 13.65,36.17 13.4,35.92 11.24,35.92 10.74,35.43 10.74,34.25 11.51,33.48 11.51,33.03 11.01,32.54 7.22,32.54 CH23.MP
  Bottom 0.152: CH23.MP 8.52,30.71 ESD7.6
ADC3_IN_7-  (via drill 0.38)
  Top 0.152: ADC1.38 21.78,35.82 20.97,36.63 15.65,36.63 14.9,35.87 13.78,35.87 13.53,35.62 11.36,35.62 11.05,35.3 11.05,34.37 11.81,33.61 11.81,32.91 10.88,31.98 7.88,31.98 6.69,30.8 6.69,30.17 5.93,29.4 4.85,29.4 4.08,30.17 4.08,31.25 5.9,33.07 9.4,33.07 10,33.67 R54.2 10.57,33.26 v10.97,33.26
  Bottom 0.152: v10.97,33.26 10.9,33.26 R2.2
AGND  (via drill 0.38, 0.75)  (10 unrouted)